# Altium PCB bumblebee.PcbDoc
Units mm, origin at the board's own origin, x right, y up, seen from the top; angles counter-clockwise.
Board outline 56 x 56 mm, 4 copper layers (L1 (Sig), L2 (GND), L3 (GND), L4 (Sig)), stack 1.589 mm thick; 50 components, 40 nets, 254 pads, 127 vias.
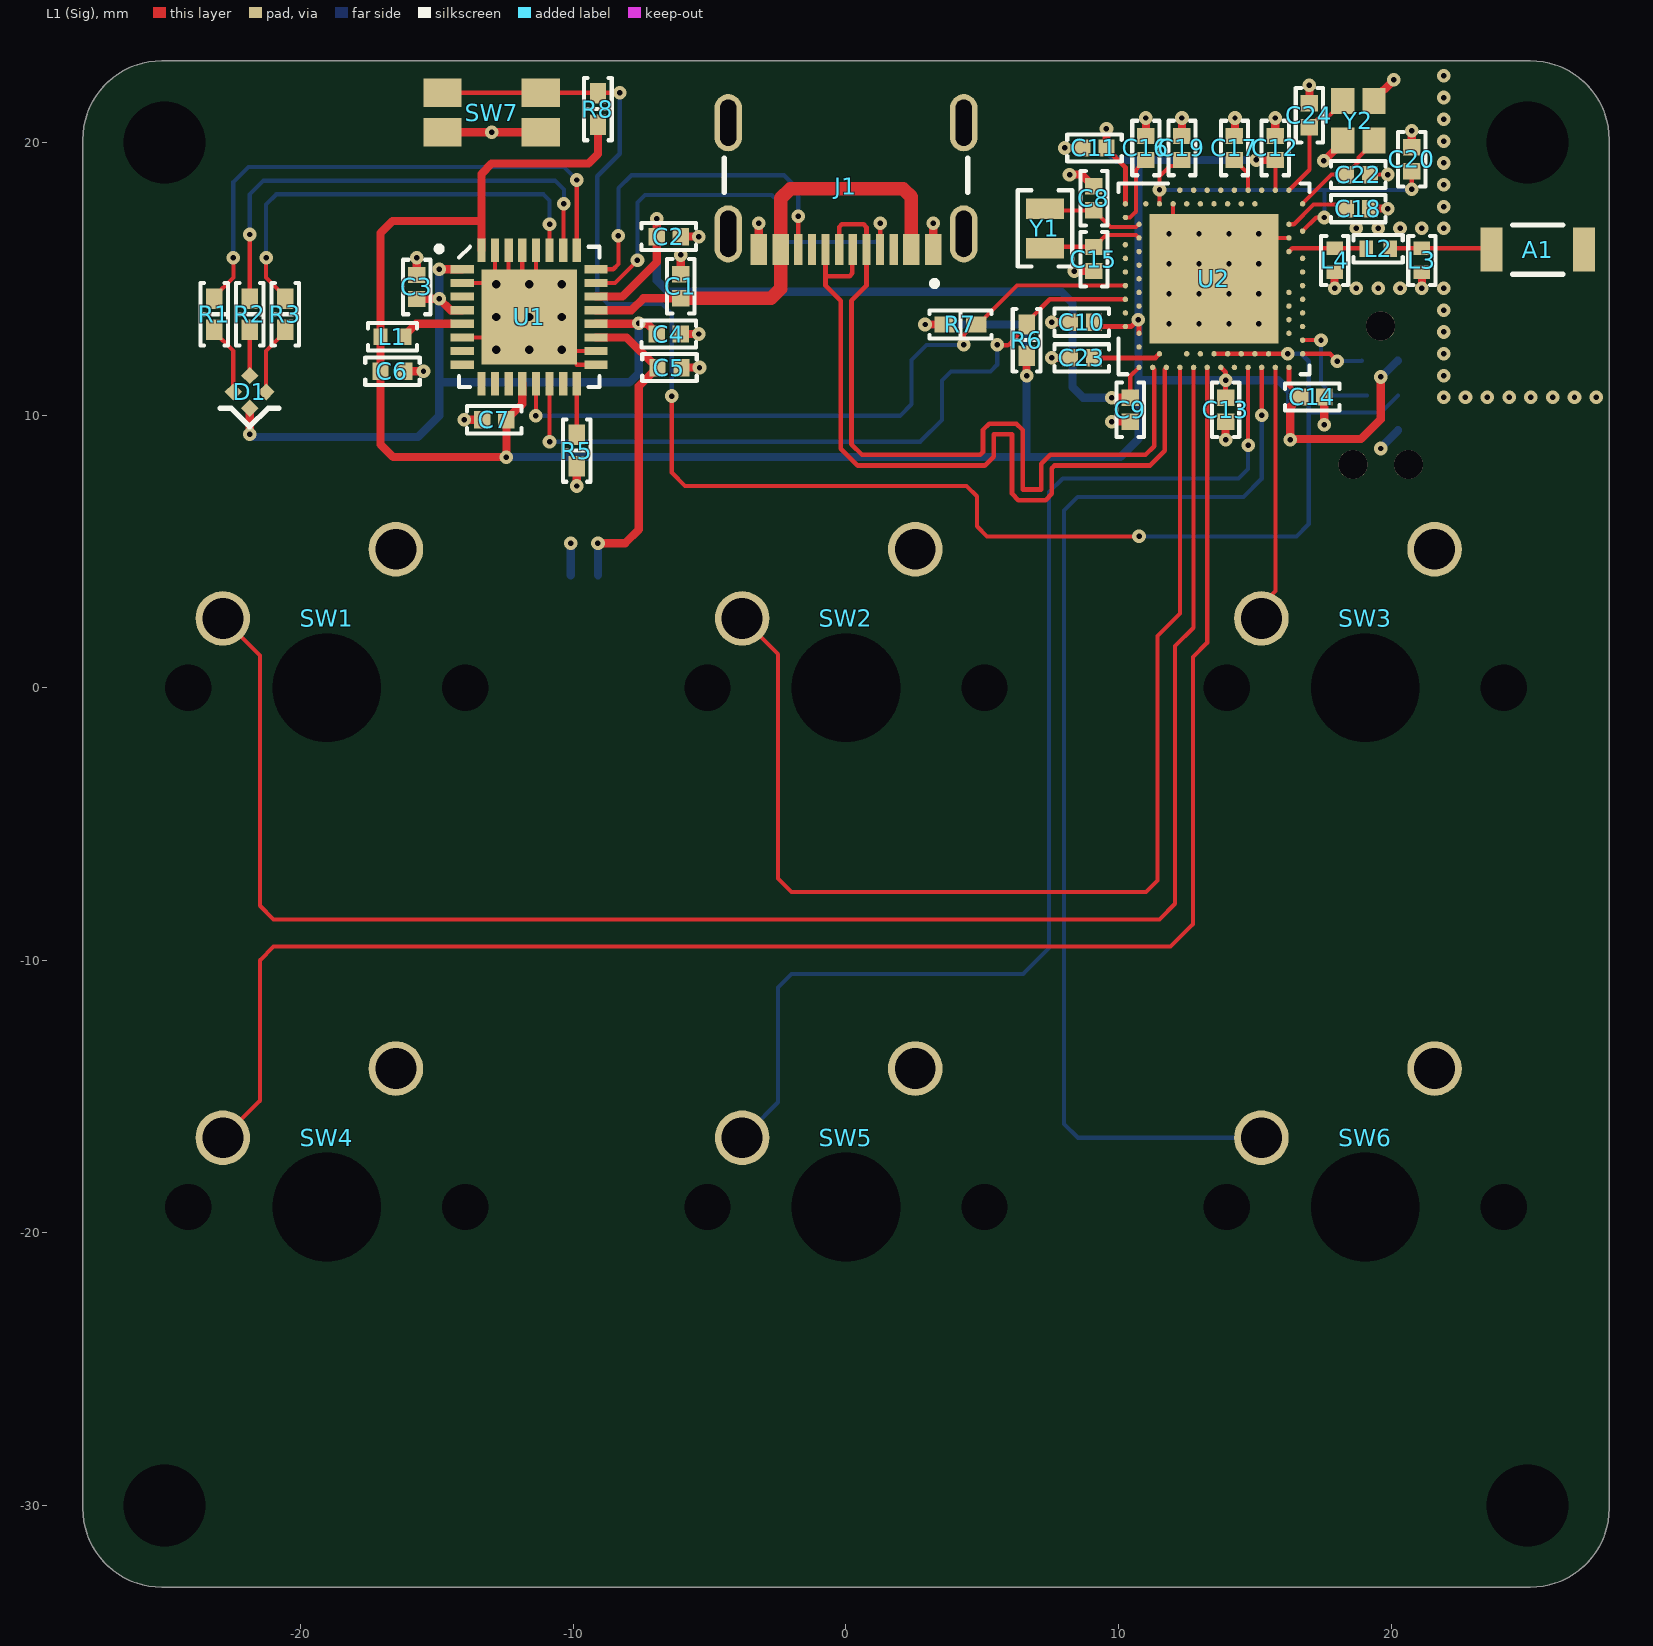
[diagram p0: L1 (Sig) view]
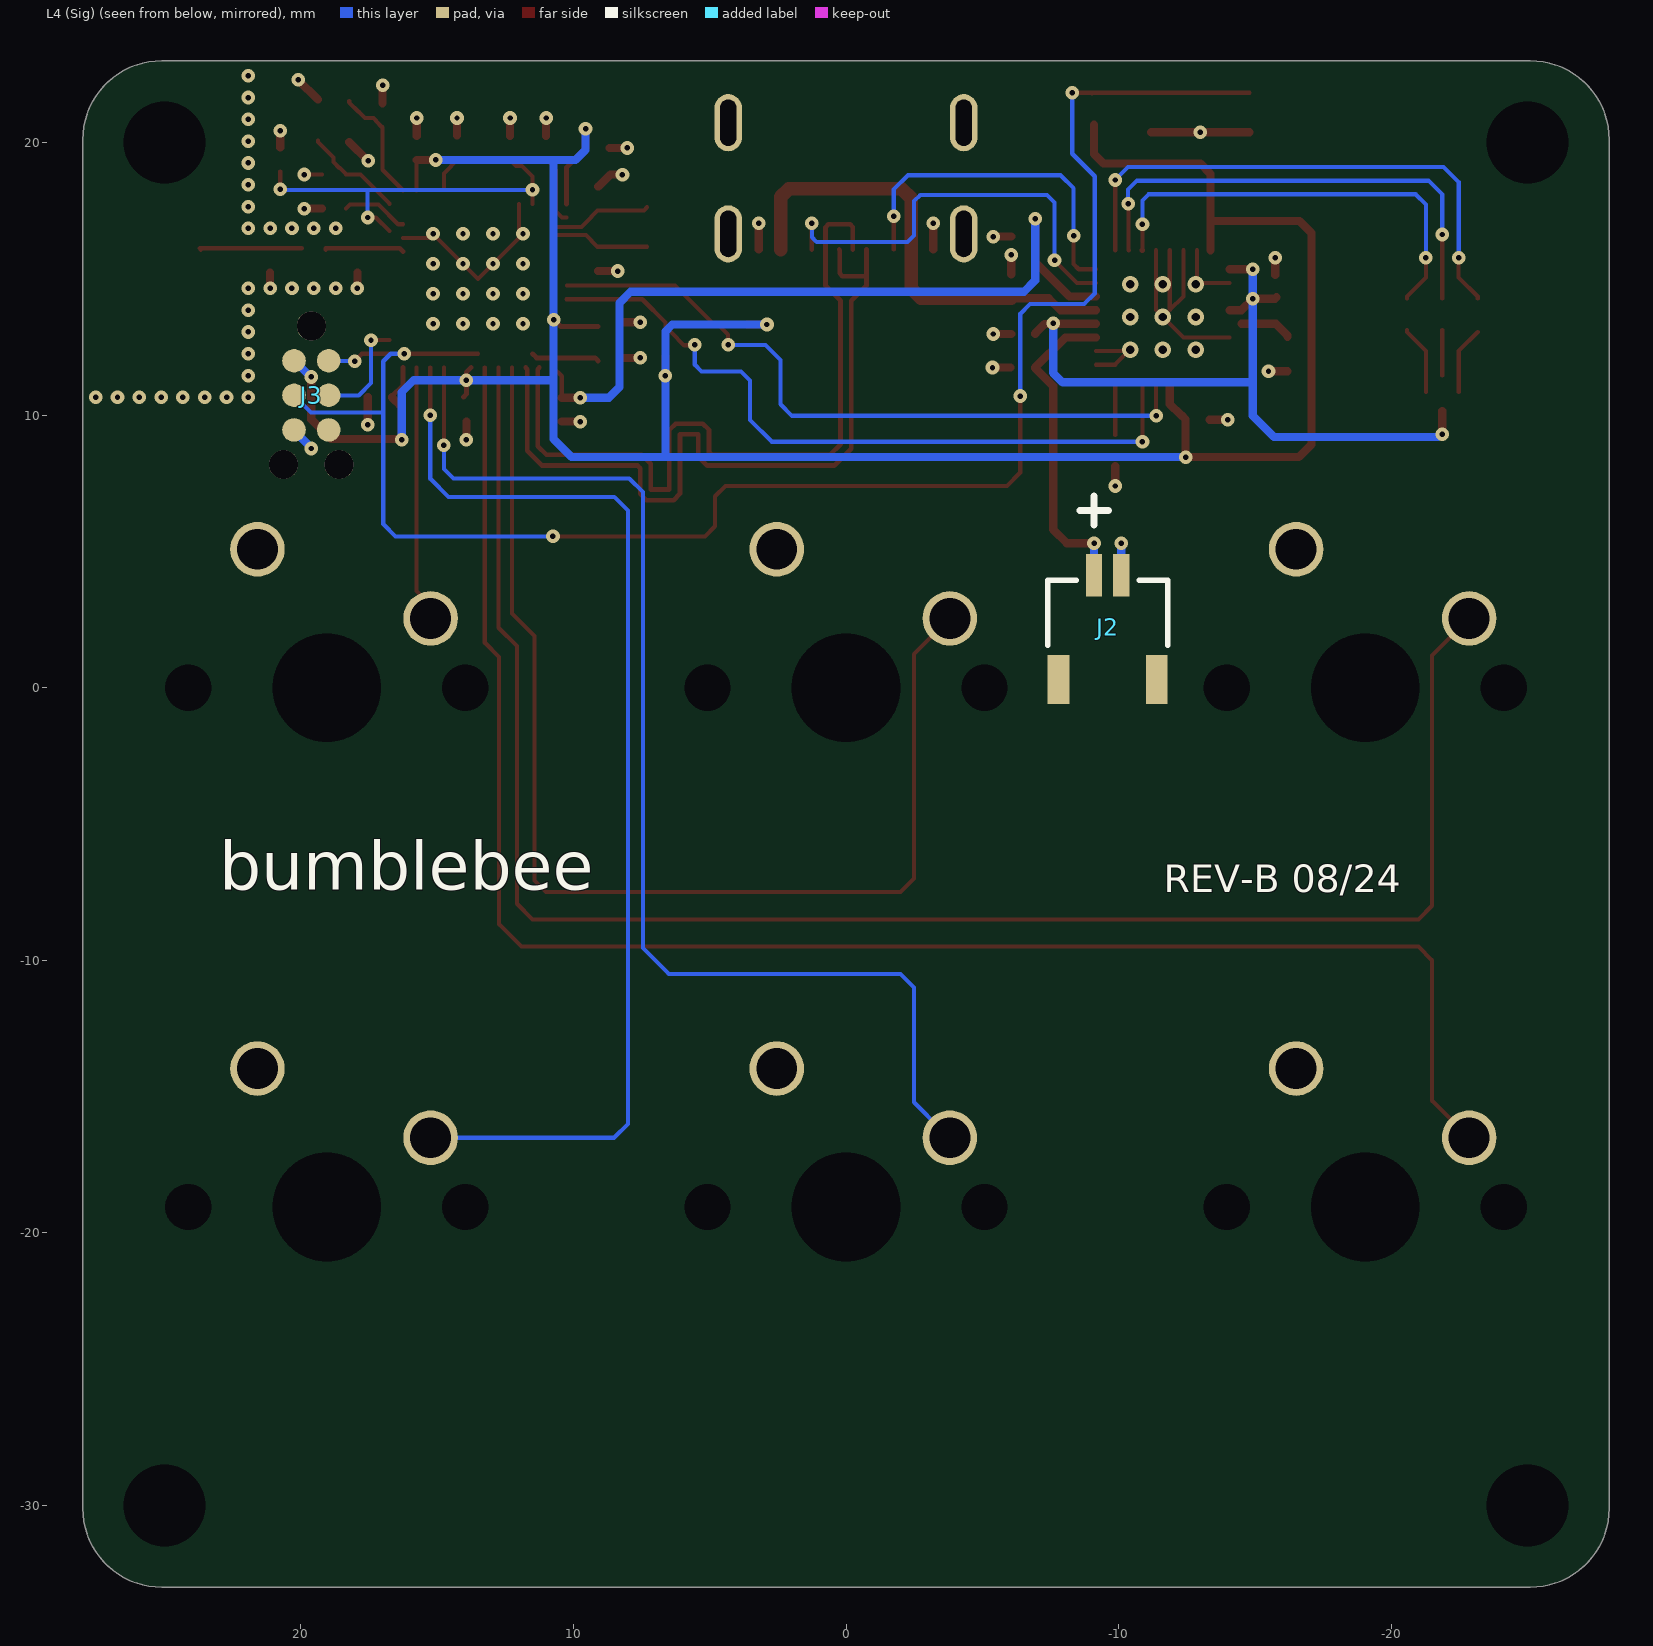
[diagram p1: L4 (Sig) view, seen from below]
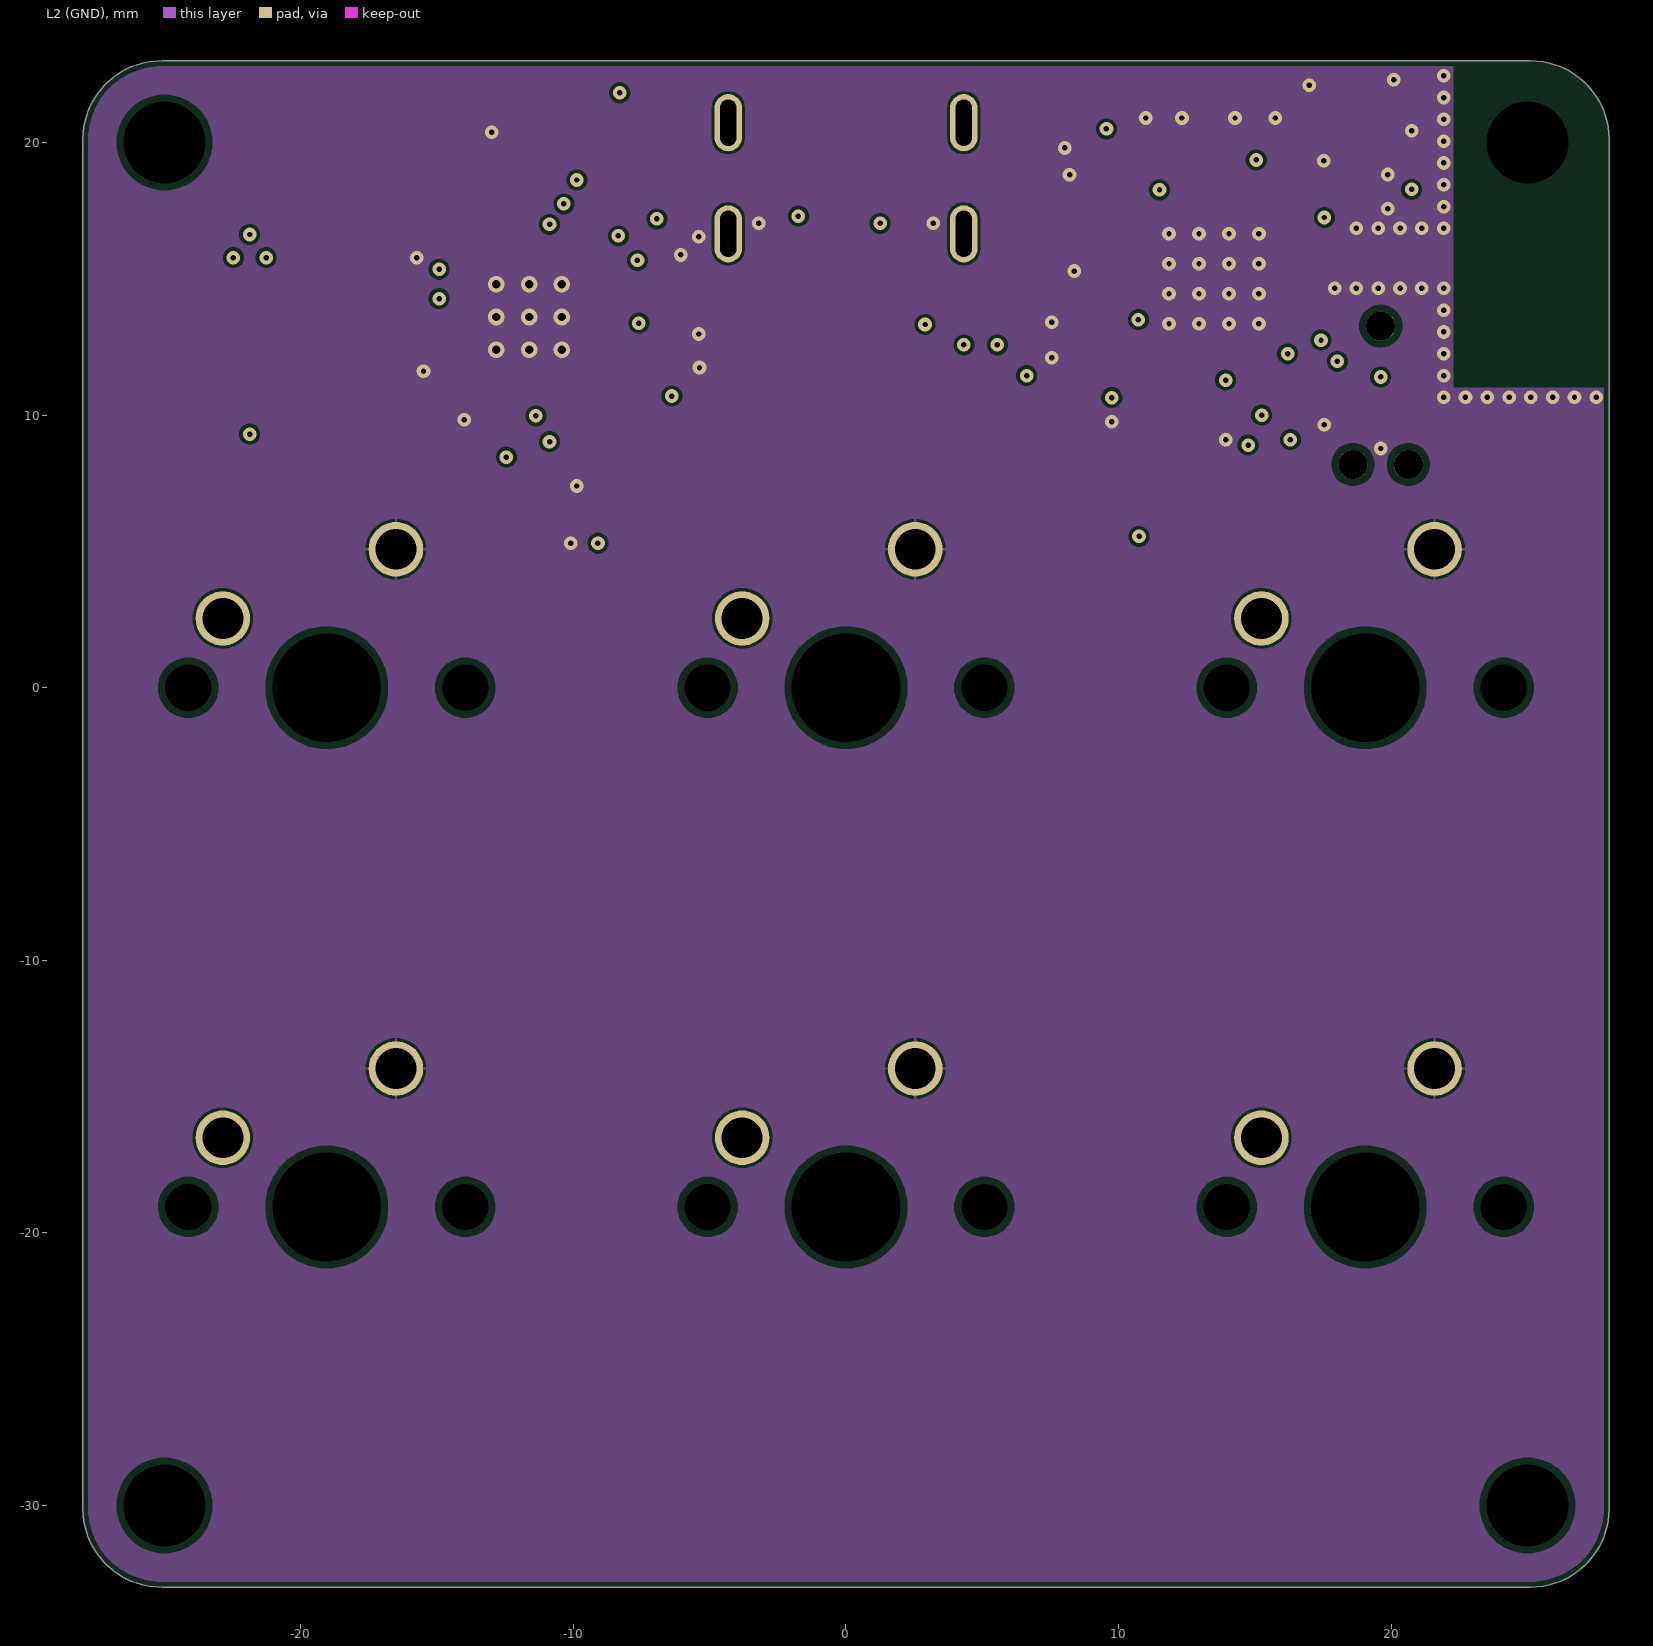
[diagram p2: L2 (GND)]
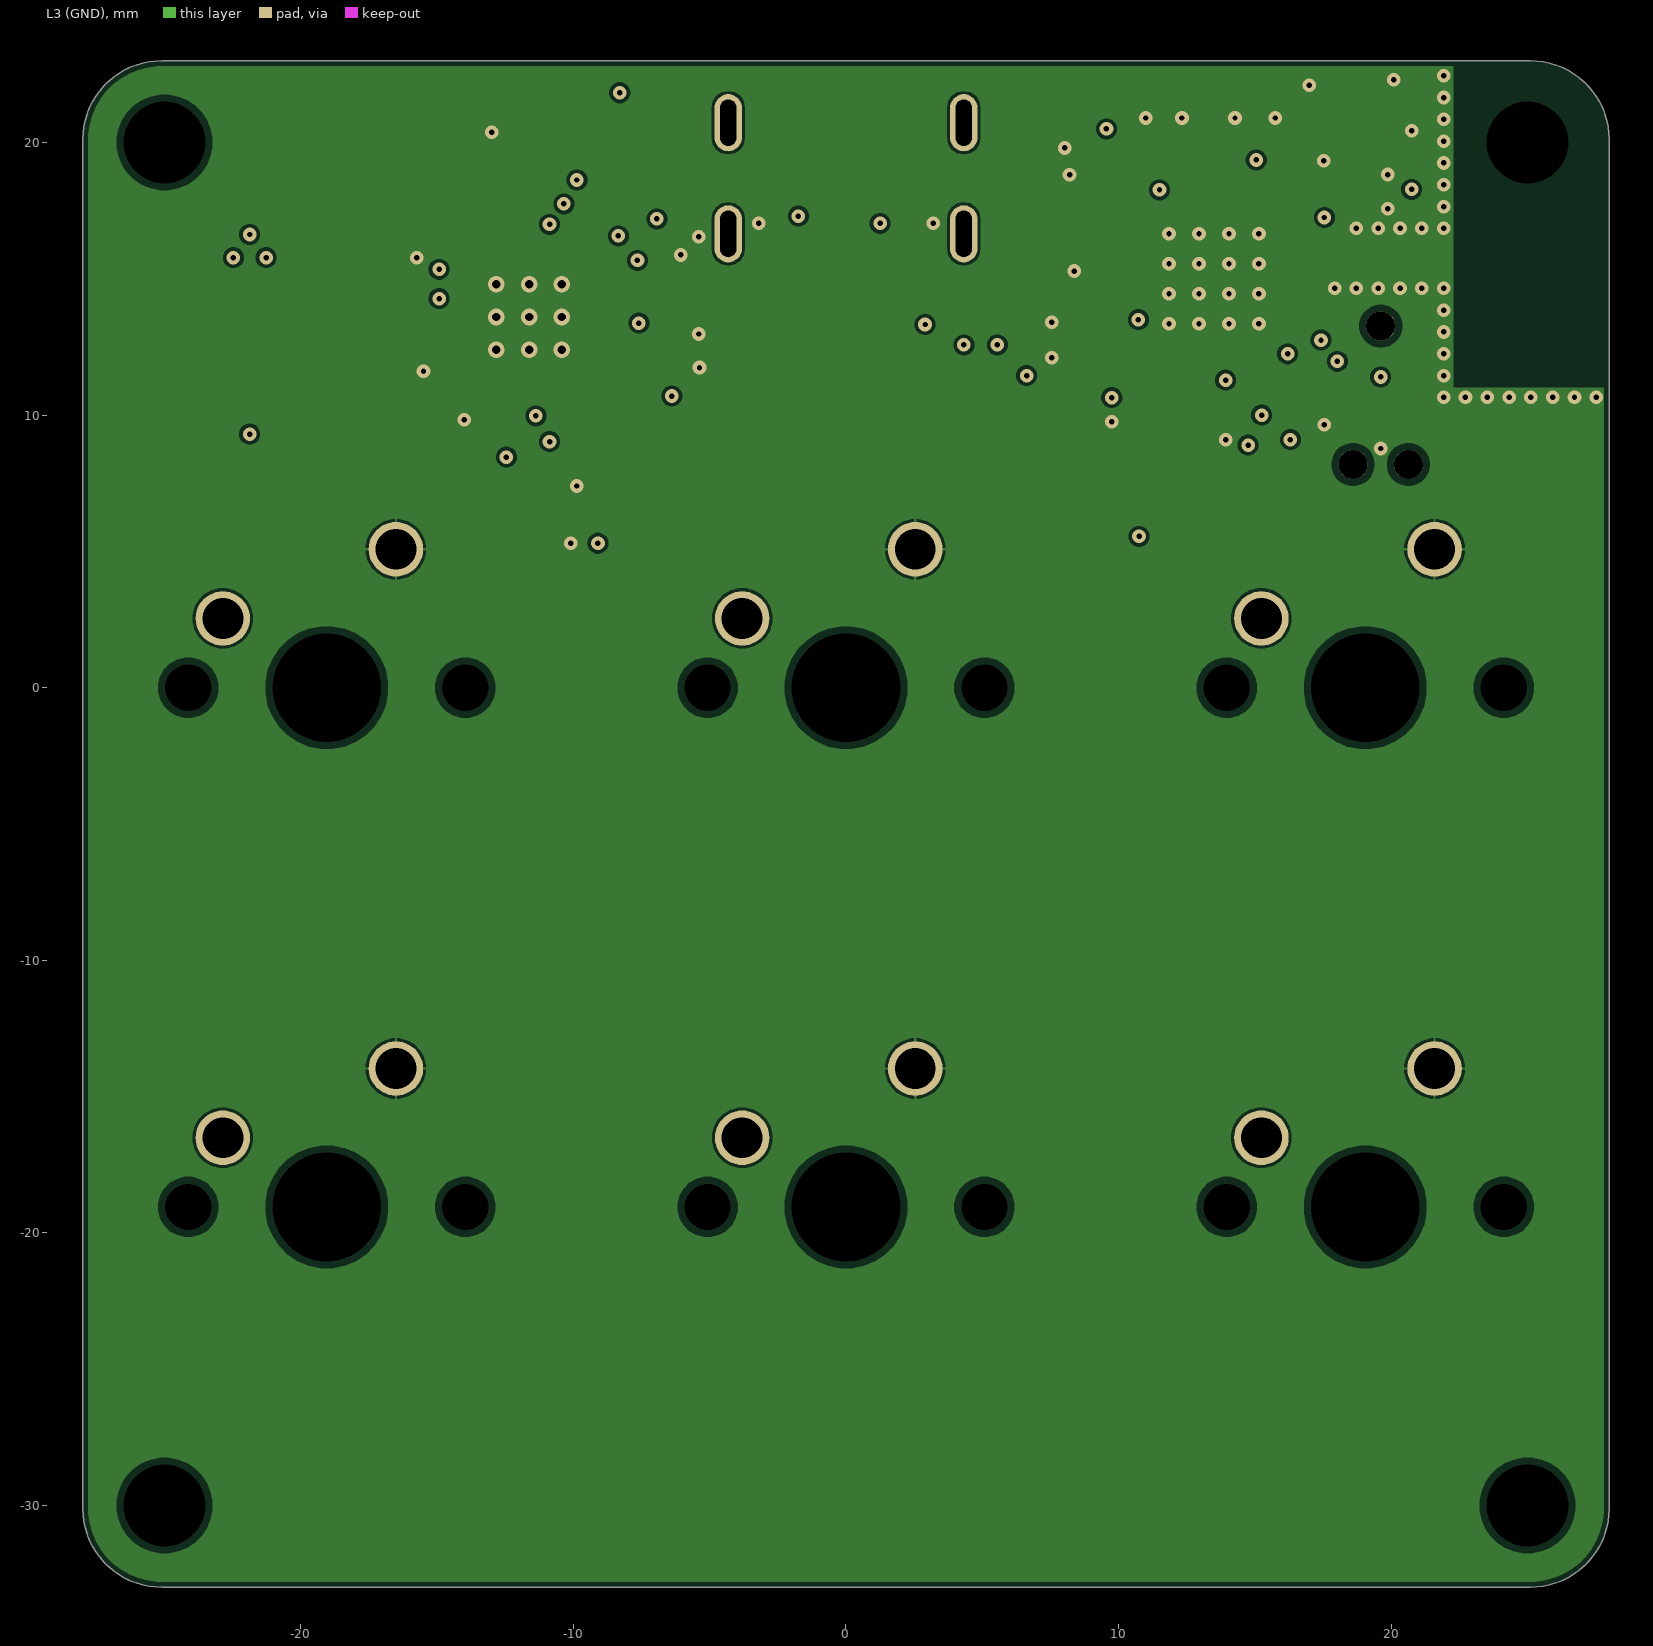
[diagram p3: L3 (GND)]

## Layer stack, top to bottom
Board Layer Stack Top Solder: solder mask 0.0254, SM-001, Dk 4
L1 (Sig): signal copper 0.035
Dielectric 1: prepreg 0.1118, PP-015, Dk 4.1
L2 (GND): signal copper 0.0152
Dielectric 3: core 1.265, Core-039, Dk 4.6
L3 (GND): signal copper 0.0152
Dielectric 5: prepreg 0.1118, PP-015, Dk 4.1
L4 (Sig): signal copper 0.035
Board Layer Stack Bottom Solder: solder mask 0.0254, SM-001, Dk 4

## Board outline
-28,-30.1 ccw(c-25.1,-30.1) -25.1,-33 25.1,-33 ccw(c25.1,-30.1) 28,-30.1 28,20.1 ccw(c25.1,20.1) 25.1,23 -25.1,23 ccw(c-25.1,20.1) -28,20.1

## Design rules (kind name [scope] priority, off if disabled: settings)
BoardOutlineClearance [All] p1: gap=0.2 ignorepadtopadclearanceinfootprint=FALSE
Clearance [All] p1: gap=0.102 ignorepadtopadclearanceinfootprint=FALSE except(0.127: Arc-Via Track-Via SMDPad-Via THPad-Via Via-Via Via-Fill Via-Poly Via-Region Via-Text; 0.25: Arc-Hole Track-Hole SMDPad-Hole THPad-Hole Via-Hole Fill-Hole Poly-Hole Region-Hole Text-Hole)
ComponentClearance [All] p1: gap=0.102 collisioncheckmode=3 verticalgap=0.102 showdistances=TRUE
DiffPairsRouting [All] p1: maxlimit=0.22 minlimit=0.2 mostfreqgap=0.2 toplayer_minwidth=0.17 toplayer_maxwidth=0.17 toplayer_prefwidth=0.17 bottomlayer_minwidth=0.17 bottomlayer_maxwidth=0.17 bottomlayer_prefwidth=0.17 impedanceprofiledriven=TRUE impedanceprofileid={1EA49EFE-481B-4B63-AF88-01475B9CDD26} impedanceprofilevalue=90.000000 maxuncoupledlength=12.7
Height [All] p1: minheight=0 maxheight=1816.048 prefheight=12.7
HoleSize [All] p1: absolutevalues=TRUE maxlimit=6.3 minlimit=0.2 maxpercent=80.000 minpercent=20.000
HoleToHoleClearance [All] p1: gap=0.5 allowstackedmicrovias=FALSE
MinimumAnnularRing [All] p1: minimumring=0.13
MinimumSolderMaskSliver [All] p1: minsoldermaskwidth=0
PlaneClearance [All] p1: clearance=0.102
PlaneConnect PlaneConnectPowerPads [InPadClass('PowerPads')] p1: planeconnectstyle=Direct reliefexpansion=0.508 reliefentries=4 reliefconductorwidth=0.254 reliefairgap=0.254
PlaneConnect [All] p2: pad.planeconnectstyle=Relief pad.reliefexpansion=0.3 pad.reliefentries=4 pad.reliefconductorwidth=0.102 pad.reliefairgap=0.102 via.planeconnectstyle=Direct via.reliefexpansion=0.3 via.reliefentries=4 via.reliefconductorwidth=0.127 via.reliefairgap=0.127
PolygonConnect PolygonConnectPowerPads [All vs (InPadClass('PowerPads'))] p1: connectstyle=Direct reliefconductorwidth=0.254 reliefentries=4 polygonreliefangle="90 Angle" airgapwidth=0.254
PolygonConnect [InNet('GND')] p2: thpad.connectstyle=Relief thpad.reliefconductorwidth=0.102 thpad.reliefentries=4 thpad.polygonreliefangle="90 Angle" thpad.airgapwidth=0.102 smdpad.connectstyle=Relief smdpad.reliefconductorwidth=0.102 smdpad.reliefentries=4 smdpad.polygonreliefangle="90 Angle" smdpad.airgapwidth=0.102 via.connectstyle=Direct via.reliefconductorwidth=0.127 via.reliefentries=4 via.polygonreliefangle="90 Angle" via.airgapwidth=0.127
RoutingVias [All] p1: holewidth=0.2 width=0.35 viastyle="Through Hole" minholewidth=0.2 minwidth=0.35 maxholewidth=6.3 maxwidth=6.55
SilkToSilkClearance [All] p1: silktosilkclearance=0
SilkToSolderMaskClearance [IsPad] p1: minsilkscreentomaskgap=0.102 clearancetoexposedcopper=TRUE
SolderMaskExpansion [All] p1: expansion=0.075 istentingtop=FALSE
SupplyNets "Schematic Supply Nets_8" [InNet('3V3')] p1: voltage=0.000
SupplyNets "Schematic Supply Nets_6" [InNet('VBUS')] p2: voltage=0.000
SupplyNets "Schematic Supply Nets_5" [InNet('VSYS')] p3: voltage=0.000
SupplyNets "Schematic Supply Nets_4" [InNet('VUSB')] p4: voltage=0.000
SupplyNets "Schematic Supply Nets_1" [InNet('VBAT')] p5: voltage=0.000
SupplyNets "Schematic Supply Nets" [InNet('GND')] p6: voltage=0.000
Width [All] p1: maxlimit=1816.048 minlimit=0.102 preferedwidth=0.102
20 further rules are at their usual default settings.

## Classes and differential pairs
component class 3_peripherals: J3 SW1 SW2 SW3 SW4 SW5 SW6
component class 1_power: C1 C2 C3 C4 C5 C6 C7 D1 J1 J2 L1 R1 R2 R3 R5 U1
component class 2_mcu: A1 C8 C9 C10 C11 C12 C13 C14 C15 C16 C17 C18 C19 C20 C22 C23 C24 L2 L3 L4 R6 R7 R8 SW7 U2 Y1 Y2
differential pair USB_D: +USB_D_P -USB_D_N

## Components (designator, comment, footprint, x,y, rotation, side; value= is the part's Value field where it differs from the comment)
A1 "AMCA31-2R450G-S1F-T3" FP-AMCA31-MFG 25.375,16.075 r0 top
C1 "1µ" "CAP 0402_1005" -6.06,14.725 r270 top
C2 "1 µ" "CAP 0402_1005" -6.5,16.55 r180 top
C3 "10 µ" "CAP 0402_1005" -15.75,14.7 r90 top
C4 "10 µ" "CAP 0402_1005" -6.5,12.975 r0 top
C5 "2.2 µ" "CAP 0402_1005" -6.475,11.745 r180 top
C6 "10 µ" "CAP 0402_1005" -16.637,11.608 r180 top
C7 "0.1µ" "CAP 0402_1005" -12.9,9.828 r0 top
C8 "18 p" "CAP 0402_1005" 9.095,17.95 r90 top
C9 "4.7 µ" "CAP 0402_1005" 10.425,10.2 r90 top
C10 "4.7 µ" "CAP 0402_1005" 8.655,13.408 r0 top
C11 "1µ" "CAP 0402_1005" 9.115,19.8 r0 top
C12 "0.1µ" "CAP 0402_1005" 15.75,19.8 r270 top
C13 "0.1µ" "CAP 0402_1005" 13.925,10.2 r90 top
C14 "0.1µ" "CAP 0402_1005" 17.1,10.665 r180 top
C15 "18 p" "CAP 0402_1005" 9.095,15.725 r270 top
C16 "0.1µ" "CAP 0402_1005" 11,19.8 r270 top
C17 "N.C." "CAP 0402_1005" 14.25,19.8 r270 top
C18 "100 p" "CAP 0402_1005" 18.785,17.575 r180 top
C19 "N.C." "CAP 0402_1005" 12.325,19.8 r270 top
C20 "1µ" "CAP 0402_1005" 20.752,19.38 r270 top
C22 "8 p" "CAP 0402_1005" 18.785,18.825 r180 top
C23 "4.7 µ" "CAP 0402_1005" 8.655,12.1 r180 top
C24 "8 p" "CAP 0402_1005" 17,21 r270 top
D1 "Red, Green, Blue (RGB)" "Citizen CL-505S-X-SD-T" -21.876,10.851 r315 top
J1 "USB4105-GF-A" GCT_USB4105-GF-A 0,18.4 r180 top
J2 "T1M-02-T-SH-L-K" SAMTEC_T1M-02-T-SH-L-K -9.6,4.125 r180 bottom locked
J3 "TC2030-IDC-NL" TAG_TC2030-IDC-NL 19.615,10.725 r270 bottom
L1 "2.2 µ" "IND 0402_1005" -16.637,12.878 r180 top
L2 "8.3 n" "IND 0402_1005" 19.525,16.1 r180 top
L3 "N.C." "IND 0402_1005" 21.125,15.675 r90 top value="8.3 n"
L4 "9.7 n" "IND 0402_1005" 17.925,15.675 r270 top
R1 "470R" "RES 0402_1005" -23.175,13.7 r90 top
R2 "470 Ohms" "RES 0402_1005" -21.876,13.7 r90 top
R3 "470 Ohms" "RES 0402_1005" -20.575,13.7 r90 top
R5 "300 k" "RES 0402_1005" -9.875,8.7 r90 top
R6 "10 k" "RES 0402_1005" 6.625,12.75 r90 top
R7 "10 k" "RES 0402_1005" 4.2,13.325 r180 top
R8 "10 k" "RES 0402_1005" -9.1,21.225 r90 top
SW1 "MX1A-11NW" CHRY-MX1A-11NW_V -19.05,0 r0 top locked
SW2 "MX1A-11NW" CHRY-MX1A-11NW_V 0,0 r0 top locked
SW3 "MX1A-11NW" CHRY-MX1A-11NW_V 19.05,0 r0 top locked
SW4 "MX1A-11NW" CHRY-MX1A-11NW_V -19.05,-19.05 r0 top locked
SW5 "MX1A-11NW" CHRY-MX1A-11NW_V 0,-19.05 r0 top locked
SW6 "MX1A-11NW" CHRY-MX1A-11NW_V 19.05,-19.05 r0 top locked
SW7 "PTS840 GK SMTR LFS" EVQP7A_J_B_K -13,21.1 r180 top
U1 "NPM1300-QEAA-R" Nordic_QFN50P500X500X90-33N -11.625,13.6 r0 top locked
U2 "NRF52840-QIAA-R" NRSC-AQFN-73 13.5,15 r0 top locked
Y1 "32.768 kHz" "ABRACON ABS06" 7.3,16.85 r90 top locked
Y2 "32MHz" BT-XTAL_2016 18.8,20.8 r90 top locked

## Footprints (in the part's own frame and the unit in brackets; to place one, negate y for a bottom-side part, rotate by r counter-clockwise, add the part's x,y. Pads: shape width x height; smd on the part's side, far side on the other; paste and mask are expansions set on the pad)
"ABRACON ABS06" [mm] "Crystal, 2-Leads, Body 1.20x2.00mm, Pitch 1.50mm, IPC Medium Density"
  rect 0.75x1.4 smd: 1(-0.725,0) 2(0.725,0)
  silkscreen extent -1.4,-1 1.4,1, body extent -1.02,-0.62 1.03,0.63, height 0.6
BT-XTAL_2016 [mm]
  rect 0.95x0.85 smd: 1(-0.725,-0.575) 2(0.725,-0.575) 3(0.725,0.575) 4(-0.725,0.575)
  body extent -1.05,-0.85 1.05,0.85, height 0.56
"CAP 0402_1005" [mm] "Chip Capacitor, 2-Leads, Body 1.02x0.51mm, IPC Medium Density"
  rect 0.6x0.64 smd: 1(-0.44,0) 2(0.44,0)
  silkscreen extent -1,-0.5 1,0.5, body extent -0.5,-0.26 0.5,0.26, height 0.52
CHRY-MX1A-11NW_V [mm] "THD, 2-Leads, Body 15.6x15.6mm"
  round 2 hole 1.499 paste-2539.97: 1(-3.81,2.54) 2(2.54,5.08)
  round 0 hole 3.988 unplated paste-2539.97: MH1(0,0)
  round 0 hole 1.702 unplated paste-2539.97: MH2(-5.08,0) MH3(5.08,0)
"Citizen CL-505S-X-SD-T" [mm] "4-Leads, Body 1.0x1.0mm"
  rect 0.45x0.45 smd mask+0: 1(-0.425,-0.425) 3(0.425,0.425)
  rect 0.45x0.45 smd paste+0 mask+0: 2(-0.425,0.425) 4(0.425,-0.425)
  silkscreen extent -0.33,-1.18 1.18,0.33, body extent -0.5,-0.5 0.5,0.5, height 0.26
EVQP7A_J_B_K [mm]
  rect 1.4x1.05 smd: 1(-1.8,0.725) 1(1.8,0.725) 2(-1.8,-0.725) 2(1.8,-0.725)
  body extent -2.35,-2.1 2.35,1.45, height 1.35
FP-AMCA31-MFG [mm]
  rect 0.8x1.6 smd paste+0 mask+0: 1(-1.7,0) 2(1.7,0)
  silkscreen extent -0.92,-0.9 0.92,0.9, body extent -2.2,-1 2.2,1, height 0.25
GCT_USB4105-GF-A [mm]
  rect 0.6x1.15 smd: A1B12(-3.2,2.327) A4B9(-2.4,2.327) B1A12(3.2,2.327) B4A9(2.4,2.327)
  rect 0.3x1.15 smd: A5(-1.25,2.327) A6(-0.25,2.327) A7(0.25,2.327) A8(1.25,2.327) B5(1.75,2.327) B6(0.75,2.327) B7(-0.75,2.327) B8(-1.75,2.327)
  oval 1x2.1 hole 0.6 slot 1.7 at 90 deg: SH1(-4.32,1.752) SH2(4.32,1.752) SH3(-4.32,-2.327) SH4(4.32,-2.327)
  silkscreen extent -4.47,-1.03 4.47,3.67, body extent -4.47,-5.03 4.47,2.68, height 3.31
"IND 0402_1005" [mm] "Inductor, 2-Leads, Body 1.02x0.51mm, IPC Medium Density"
  rect 0.5x0.6 smd: 1(-0.44,0) 2(0.44,0)
  silkscreen extent -0.9,-0.5 0.9,0.5, body extent -0.5,-0.3 0.5,0.3, height 0.6
Nordic_QFN50P500X500X90-33N [mm]
  rect 0.85x0.3 smd mask+0.076: 1(-2.45,1.75) 2(-2.45,1.25) 3(-2.45,0.75) 4(-2.45,0.25) 5(-2.45,-0.25) 6(-2.45,-0.75) 7(-2.45,-1.25) 8(-2.45,-1.75) 17(2.45,-1.75) 18(2.45,-1.25) 19(2.45,-0.75) 20(2.45,-0.25) 21(2.45,0.25) 22(2.45,0.75) 23(2.45,1.25) 24(2.45,1.75)
  rect 0.3x0.85 smd mask+0.076: 9(-1.75,-2.45) 10(-1.25,-2.45) 11(-0.75,-2.45) 12(-0.25,-2.45) 13(0.25,-2.45) 14(0.75,-2.45) 15(1.25,-2.45) 16(1.75,-2.45) 25(1.75,2.45) 26(1.25,2.45) 27(0.75,2.45) 28(0.25,2.45) 29(-0.25,2.45) 30(-0.75,2.45) 31(-1.25,2.45) 32(-1.75,2.45)
  rect 3.5x3.5 smd: 33(0,0)
  silkscreen extent -3.4,-2.57 2.57,2.6, body extent -2.5,-2.5 2.5,2.5, height 0.9
NRSC-AQFN-73 [mm] "AQFN, 73-Leads, Body 7x7mm, Pitch 0.5mm"
  rect 4.75x4.75 smd: 74(0,0)
  round 0.2 smd: A8(-1.25,3.25) A10(-0.75,3.25) A12(-0.25,3.25) A14(0.25,3.25) A16(0.75,3.25) A18(1.25,3.25) A20(1.75,3.25) A22(2.25,3.25) A23(2.75,3.25) AA24(3.25,-2.25) AB2(-2.75,-2.5) AC5(-2,-2.75) AC9(-1,-2.75) AC11(-0.5,-2.75) AC13(0,-2.75) AC15(0.5,-2.75) AC17(1,-2.75) AC19(1.5,-2.75) AC21(2,-2.75) AC24(3.25,-2.75) AD2(-2.75,-3.25) AD4(-2.25,-3.25) AD6(-1.75,-3.25) AD8(-1.25,-3.25) AD10(-0.75,-3.25) AD12(-0.25,-3.25) AD14(0.25,-3.25) AD16(0.75,-3.25) AD18(1.25,-3.25) AD20(1.75,-3.25) AD22(2.25,-3.25) AD23(2.75,-3.25) B1(-3.25,2.75) B3(-2.5,2.75) B5(-2,2.75) B7(-1.5,2.75) B9(-1,2.75) B11(-0.5,2.75) B13(0,2.75) B15(0.5,2.75) B17(1,2.75) B19(1.5,2.75) B24(3.25,2.75) C1(-3.25,2.25) D2(-2.75,2) D23(2.75,2) E24(3.25,1.75) F2(-2.75,1.5) F23(2.75,1.5) G1(-3.25,1.25) H2(-2.75,1) H23(2.75,1) J1(-3.25,0.75) J24(3.25,0.75) K2(-2.75,0.5) L1(-3.25,0.25) L24(3.25,0.25) M2(-2.75,0) N1(-3.25,-0.25) N24(3.25,-0.25) P2(-2.75,-0.5) P23(2.75,-0.5) R1(-3.25,-0.75) R24(3.25,-0.75) T2(-2.75,-1) T23(2.75,-1) U1(-3.25,-1.25) U24(3.25,-1.25) V23(2.75,-1.5) W1(-3.25,-1.75) W24(3.25,-1.75) Y2(-2.75,-2) Y23(2.75,-2)
  silkscreen extent -3.5,-3.5 3.5,3.5, body extent -3.5,-3.5 3.5,3.5, height 0.85
"RES 0402_1005" [mm] "Chip Resistor, 2-Leads, Body 1.0x0.5mm, IPC Medium Density"
  rect 0.75x0.6 smd: 1(-0.575,0) 2(0.575,0)
  silkscreen extent -1.14,-0.51 1.14,0.51, body extent -0.5,-0.25 0.5,0.25, height 0.35
SAMTEC_T1M-02-T-SH-L-K [mm]
  rect 0.6x1.55 smd: 1(-0.5,0) 2(0.5,0)
  rect 0.8x1.8 smd: S1(-1.8,-3.825) S2(1.8,-3.825)
  silkscreen extent -2.2,-2.58 2.2,-0.18, body extent -2.03,-4.89 1.97,0.06, height 2.95
TAG_TC2030-IDC-NL [mil]
  round 33.98 smd: 1(-50,-25) 2(-50,25) 3(0,-25) 4(0,25) 5(50,-25) 6(50,25)
  round 42.01 hole 42.01 unplated: MH1(-100,0) MH2(100,40) MH3(100,-40)

## Part data
A1: library part CMP-00025-00004-1, "2.45GHz Bluetooth, IoT, ISM, M2M, Wi-Fi, ZigBee™ Chip RF Antenna 2.4GHz ~ 2.5GHz 2.3dBi Solder Surface Mount", Case/Package=Chip, Frequency=2.45GHz, Max Operating Temperature=85°C, Min Operating Temperature=-40°C, Power - Max="3 W", Gain=2.3dBi, Impedance=50Ω, Mounting Technology="Surface Mount", Pins=2, RF Family/Standard="Bluetooth, General ISM, WiFi", RoHS Compliant="ROHS3 Compliant"
C1 C11 C20: library part 885012105012, "CAP CER 1UF 10V X5R 0402", Capacitance="1 µF", Device Package="0402 (1005 Metric)", Manufacturer="Würth Elektronik", Operating Temperature="-55°C ~ 85°C", Supplier Part Number 1=732-7489-1-ND, Temperature Coefficient=X5R, Tolerance=±20%, Voltage - Rated=10V, Applications="General Purpose", ComponentLink1Description=Datasheet, ComponentLink1URL=https://katalog.we-online.de/pbs/datasheet/885012105012.pdf, ComponentLink2Description="DigiKey Link", ComponentLink2URL=https://www.digikey.com/en/products/detail/würth-elektronik/885012105012/5453344, lastupdated="2/9/2024 8:04:38 PM", Lifecycle Status=Active, Minimum Order=1, Mounting Type="Surface Mount, MLCC", Package / Case="0402 (1005 Metric)", Packaging=TapeAndReel, Part Number=885012105012, Part Status=Active, partid=1807, Price=0.16, Series=WCAP-CSGP, Size / Dimension="0.039\" L x 0.020\" W (1.00mm x 0.50mm)", Supplier 1=DigiKey, Thickness (Max)="0.022\" (0.55mm)"
C2: library part 885012105012, "CAP CER 1UF 10V X5R 0402", Device Package="0402 (1005 Metric)", Manufacturer="Würth Elektronik", Operating Temperature="-55°C ~ 85°C", Supplier Part Number 1=732-7489-1-ND, Temperature Coefficient=X5R, Tolerance=±20%, Voltage - Rated=10V, Applications="General Purpose", Capacitance="1 µ", ComponentLink1Description=Datasheet, ComponentLink1URL=https://katalog.we-online.de/pbs/datasheet/885012105012.pdf, ComponentLink2Description="DigiKey Link", ComponentLink2URL=https://www.digikey.com/en/products/detail/würth-elektronik/885012105012/5453344, lastupdated="2/9/2024 8:04:38 PM", Lifecycle Status=Active, Minimum Order=1, Mounting Type="Surface Mount, MLCC", Package / Case="0402 (1005 Metric)", Packaging=TapeAndReel, Part Number=885012105012, Part Status=Active, partid=1807, Price=0.16, Series=WCAP-CSGP, Size / Dimension="0.039\" L x 0.020\" W (1.00mm x 0.50mm)", Supplier 1=DigiKey, Thickness (Max)="0.022\" (0.55mm)"
C3 C4 C6: library part CL05A106MP8NUB8, "CAP CER 10UF 10V X5R 0402", Capacitance="10 µF", Device Package="0402 (1005 Metric)", Manufacturer="Samsung Electro-Mechanics", Operating Temperature="-55°C ~ 85°C", Supplier Part Number 1=1276-6830-1-ND, Temperature Coefficient=X5R, Tolerance=±20%, Voltage - Rated=10V, Applications="Acoustic Noise Reduction", ComponentLink1Description=Datasheet, ComponentLink1URL=http://www.samsungsem.com/kr/support/product-search/mlcc/CL05A106MP8NUB8.jsp, ComponentLink2Description="DigiKey Link", ComponentLink2URL=https://www.digikey.com/en/products/detail/samsung-electro-mechanics/CL05A106MP8NUB8/5961314, lastupdated="2/9/2024 8:04:38 PM", Lifecycle Status=Active, Minimum Order=1, Mounting Type="Surface Mount, MLCC", Package / Case="0402 (1005 Metric)", Packaging=TapeAndReel, Part Number=CL05A106MP8NUB8, Part Status=Active, partid=1758, Price=0.06, Series=CL, Size / Dimension="0.039\" L x 0.020\" W (1.00mm x 0.50mm)", Supplier 1=DigiKey, Thickness (Max)="0.035\" (0.90mm)"
C5: library part TMK105CBJ225KV-F, "CAP CER 2.2UF 25V X5R 0402", Capacitance="2.2 µF", Device Package="0402 (1005 Metric)", Manufacturer="Taiyo Yuden", Operating Temperature="-55°C ~ 85°C", Supplier Part Number 1=587-6277-1-ND, Temperature Coefficient=X5R, Tolerance=±10%, Voltage - Rated=25V, Applications="SMPS Filtering", ComponentLink1Description=Datasheet, ComponentLink1URL="https://ds.yuden.co.jp/TYCOMPAS/ut/detail?pn=TMK105CBJ225KV-F &u=M", ComponentLink2Description="DigiKey Link", ComponentLink2URL=https://www.digikey.com/en/products/detail/taiyo-yuden/TMK105CBJ225KV-F/7403799, lastupdated="2/9/2024 8:04:38 PM", Lifecycle Status=Active, Minimum Order=1, Mounting Type="Surface Mount, MLCC", Package / Case="0402 (1005 Metric)", Packaging=TapeAndReel, Part Number=TMK105CBJ225KV-F, Part Status=Active, partid=1822, Price=0.02, Series=M, Size / Dimension="0.039\" L x 0.020\" W (1.00mm x 0.50mm)", Supplier 1=DigiKey, Thickness (Max)="0.028\" (0.70mm)"
C7 C12 C13 C14 C16 C17 C19: library part 0402ZC104KAT2A, "CAP CER 0.1UF 10V X7R 0402", Capacitance=0.1µF, Device Package="0402 (1005 Metric)", Manufacturer="AVX Corporation", Operating Temperature="-55°C ~ 125°C", Supplier Part Number 1=478-7891-1-ND, Temperature Coefficient=X7R, Tolerance=±10%, Voltage - Rated=10V, Applications="General Purpose", ComponentLink1Description=Datasheet, ComponentLink1URL=http://datasheets.avx.com/X7RDielectric.pdf, ComponentLink2Description="DigiKey Link", ComponentLink2URL=http://digikey.com/product-detail/en/avx-corporation/0402ZC104KAT2A/478-7891-1-ND/3881514, lastupdated="2/8/2022 12:26:59 PM", Lifecycle Status=Active, Minimum Order=1, Mounting Type="Surface Mount, MLCC", Package / Case="0402 (1005 Metric)", Packaging=TapeAndReel, Part Number=0402ZC104KAT2A, Part Status=Active, partid=1757, Price=0.09, Series=-, Size / Dimension="0.039\" L x 0.020\" W (1.00mm x 0.50mm)", Supplier 1=DigiKey, Thickness (Max)="0.022\" (0.55mm)"
C8 C15: library part HMK105CG180JV-F, "CAP CER 18PF 100V C0G/NP0 0402", Capacitance="18 pF", Device Package="0402 (1005 Metric)", Manufacturer="Taiyo Yuden", Operating Temperature="-55°C ~ 125°C", Supplier Part Number 1=587-5003-1-ND, Temperature Coefficient="C0G, NP0", Tolerance=±5%, Voltage - Rated=100V, Applications="General Purpose", ComponentLink1Description=Datasheet, ComponentLink1URL=http://www.yuden.co.jp/productdata/catalog/mlcc06_e.pdf, ComponentLink2Description="DigiKey Link", ComponentLink2URL=https://www.digikey.com/en/products/detail/taiyo-yuden/HMK105CG180JV-F/6563596, lastupdated="2/9/2024 8:04:38 PM", Lifecycle Status=Active, Minimum Order=1, Mounting Type="Surface Mount, MLCC", Package / Case="0402 (1005 Metric)", Packaging=TapeAndReel, Part Number=HMK105CG180JV-F, Part Status=Active, partid=1849, Price=0.03, Series=M, Size / Dimension="0.039\" L x 0.020\" W (1.00mm x 0.50mm)", Supplier 1=DigiKey, Thickness (Max)="0.022\" (0.55mm)"
C9 C10 C23: library part CL05A475MO5NUNC, "CAP CER 4.7UF 16V X5R 0402", Capacitance="4.7 µF", Device Package="0402 (1005 Metric)", Manufacturer="Samsung Electro-Mechanics", Operating Temperature="-55°C ~ 85°C", Supplier Part Number 1=1276-6836-1-ND, Temperature Coefficient=X5R, Tolerance=±20%, Voltage - Rated=16V, Applications="General Purpose", ComponentLink1Description=Datasheet, ComponentLink1URL=http://www.samsungsem.com/kr/support/product-search/mlcc/__icsFiles/afieldfile/2019/05/29/Data%20sheet_CL05A475MO5NUNC.pdf, ComponentLink2Description="DigiKey Link", ComponentLink2URL=https://www.digikey.com/en/products/detail/samsung-electro-mechanics/CL05A475MO5NUNC/5961320, lastupdated="2/9/2024 8:04:38 PM", Lifecycle Status=Active, Minimum Order=1, Mounting Type="Surface Mount, MLCC", Package / Case="0402 (1005 Metric)", Packaging=TapeAndReel, Part Number=CL05A475MO5NUNC, Part Status=Active, partid=1760, Price=0.08, Series=CL, Size / Dimension="0.039\" L x 0.020\" W (1.00mm x 0.50mm)", Supplier 1=DigiKey, Thickness (Max)="0.028\" (0.70mm)"
C18: library part 500X07N101MV4T, "CAP CER 100PF 50V C0G/NP0 0402", Capacitance="100 pF", Device Package="0402 (1005 Metric)", Manufacturer="Johanson Dielectrics Inc.", Operating Temperature="-55°C ~ 125°C", Supplier Part Number 1=709-1214-1-ND, Temperature Coefficient="C0G, NP0", Tolerance=±20%, Voltage - Rated=50V, Applications="Bypass, Decoupling", ComponentLink1Description=Datasheet, ComponentLink1URL=https://www.johansondielectrics.com/downloads/x2y-filter-and-decoupling-capacitors.pdf, ComponentLink2Description="DigiKey Link", ComponentLink2URL=https://www.digikey.com/en/products/detail/johanson-dielectrics-inc/500X07N101MV4T/2046917, Features="Low ESL (X2Y)", lastupdated="2/9/2024 8:04:38 PM", Lifecycle Status=Active, Minimum Order=1, Mounting Type="Surface Mount, MLCC", Package / Case="0402 (1005 Metric)", Packaging=TapeAndReel, Part Number=500X07N101MV4T, Part Status=Active, partid=1767, Price=0.08, Series=X2Y®, Size / Dimension="0.045\" L x 0.025\" W (1.14mm x 0.64mm)", Supplier 1=DigiKey, Thickness (Max)="0.020\" (0.51mm)"
C22 C24: library part C1005NP01H080D050BA, "CAP CER 8PF 50V NP0 0402", Capacitance="8 pF", Device Package="0402 (1005 Metric)", Manufacturer="TDK Corporation", Operating Temperature="-55°C ~ 150°C", Supplier Part Number 1=445-13781-1-ND, Temperature Coefficient="C0G, NP0", Tolerance=±0.5pF, Voltage - Rated=50V, Applications="General Purpose", ComponentLink1Description=Datasheet, ComponentLink1URL=https://product.tdk.com/info/en/catalog/datasheets/mlcc_commercial_hightemp_en.pdf?ref_disty=digikey, ComponentLink2Description="DigiKey Link", ComponentLink2URL=https://www.digikey.com/en/products/detail/tdk-corporation/C1005NP01H080D050BA/3951017, Features="High Temperature", lastupdated="2/9/2024 8:04:37 PM", Lifecycle Status=Active, Minimum Order=1, Mounting Type="Surface Mount, MLCC", Package / Case="0402 (1005 Metric)", Packaging=TapeAndReel, Part Number=C1005NP01H080D050BA, Part Status=Active, partid=2033, Price=0.01, Series=C, Size / Dimension="0.039\" L x 0.020\" W (1.00mm x 0.50mm)", Supplier 1=DigiKey, Thickness (Max)="0.022\" (0.55mm)"
D1: library part CL-505S-X-SD-T, "LED TRI TOP FIRING 1.0 X 1.0", Current - Test="5mA Red, 5mA Green, 5mA Blue", Device Package="0404 (1010 Metric)", Lens Color=0.26mm, Manufacturer=Citizen, Millicandela Rating="40mcd Red, 220mcd Green, 65mcd Blue", Supplier Part Number 1=1642-1510-1-ND, Voltage - Forward (Vf) (Typ)="1.85V Red, 2.7V Green, 2.75V Blue", Color="Red, Green, Blue (RGB)", ComponentLink1Description=Datasheet, ComponentLink1URL=http://ce.citizen.co.jp/up_img/product/sQNrj4RlM7o2/CL-505S_e.pdf, ComponentLink2Description="DigiKey Link", ComponentLink2URL=http://digikey.com/product-detail/en/citizen/CL-505S-X-SD-T/1642-1510-1-ND/6005950, Configuration="Common Anode", Height (Max)=0.26mm, lastupdated="3/19/2020 10:25:23 PM", Lens Size=1.00mm, Lens Style="Square with Flat Top", Lifecycle Status=Active, Minimum Order=1, Mounting Type="Surface Mount", Package / Case="0404 (1010 Metric)", Packaging=TapeAndReel, Part Number=CL-505S-X-SD-T, Part Status=Active, partid=955, Price=0.23, Series=CL-505S, Size / Dimension="1.00mm L x 1.00mm W", Supplier 1=DigiKey, Wavelength - Dominant="615nm Red, 530nm Green, 470nm Blue"
J1: library part CMP-002-00080-3, "USB-C (USB TYPE-C) USB 2.0 Receptacle Connector 24 (16+8 Dummy) Position Surface Mount, Right Angle; Through Hole", Case/Package=None, Component Type=Standard, Connector Type=USB-C, Design Item ID=USB4105-GF-A, Gender=Female, Mounting Technology=SMT, MP=USB4105-GF-A, Pins=16, Source=USB4105-GF-A.SchLib
J2: library part CMP-015-000000-3, "1mm JST Connector, surface mounted, horizontal orientation.", Package=None, Gender=Female, Manufacturer Part #=T1M-02-T-SH-L-K, Mounting Technology="Surface Mounted", Pins=2, RoHS Compliant="RoHS3 Compliant"
J3: library part CMP-031-000000-3, "CABLE ADAPTER 6 POS", Package=None, Availability=https://www.tag-connect.com/product/tc2030-idc-nl, Component Type=Standard, Design Item ID=TC2030-IDC-NL, MP=TC2030-IDC-NL, Pin Count=6, Price=None, Source=TC2030-IDC-NL.SchLib
L1: library part FCI1005F-2R2M, "IND  2.2UH  1.7OHM  10MA", Current Rating (Amps)="10 mA", DC Resistance (DCR)="1.7Ohm Max", Device Package="0402 (1005 Metric)", Frequency - Self Resonant=28MHz, Inductance="2.2 µH", Inductance Frequency - Test="10 MHz", Manufacturer="TAI-TECH Advanced Electronics Co., Ltd.", Operating Temperature="-55°C ~ 105°C", Q @ Freq="20 @ 10MHz", Supplier Device Package=0402, Supplier Part Number 1=4816-FCI1005F-2R2MCT-ND, Tolerance=±20%, ComponentLink2Description="DigiKey Link", ComponentLink2URL=https://www.digikey.com/en/products/detail/tai-tech-advanced-electronics-co-ltd/FCI1005F-2R2M/21672129, Height - Seated (Max)="0.024\" (0.60mm)", lastupdated="6/3/2024 8:12:05 PM", Lifecycle Status=Active, Minimum Order=1, Mounting Type="Surface Mount", Package / Case="0402 (1005 Metric)", Packaging=TapeAndReel, Part Number=FCI1005F-2R2M, partid=7361, Price=0.01, Series=FCI1005F, Shielding=Unshielded, Size / Dimension="0.039\" L x 0.020\" W (1.00mm x 0.50mm)", Supplier 1=DigiKey
L2 L3: library part LQW15AN8N3G80D, "FIXED IND 8.3NH 1.5A 0.069OHM SM", Current Rating (Amps)="1.5 A", DC Resistance (DCR)="69mOhm Max", Device Package="0402 (1005 Metric)", Frequency - Self Resonant=6.5GHz, Inductance="8.3 nH", Inductance Frequency - Test="100 MHz", Manufacturer="Murata Electronics", Operating Temperature="-55°C ~ 125°C", Q @ Freq="32 @ 250MHz", Supplier Part Number 1=490-7681-1-ND, Tolerance=±2%, ComponentLink1Description=Datasheet, ComponentLink1URL=https://search.murata.co.jp/Ceramy/image/img/P02/JELF243A-0100.pdf, ComponentLink2Description="DigiKey Link", ComponentLink2URL=https://www.digikey.com/en/products/detail/murata-electronics/LQW15AN8N3G80D/4292394, Height - Seated (Max)="0.024\" (0.60mm)", lastupdated="6/3/2024 8:12:57 PM", Lifecycle Status=Active, Material - Core=Non-Magnetic, Minimum Order=1, Mounting Type="Surface Mount", Package / Case="0402 (1005 Metric)", Packaging=TapeAndReel, Part Number=LQW15AN8N3G80D, Part Status=Active, partid=4902, Price=0.07, Series=LQW15, Shielding=Unshielded, Size / Dimension="0.039\" L x 0.024\" W (1.00mm x 0.60mm)", Supplier 1=DigiKey, Type="Drum Core, Wirewound"
L4: library part LQW15AN9N7J80D, "FIXED IND 9.7NH 1.4A 81 MOHM SMD", Current Rating (Amps)="1.4 A", DC Resistance (DCR)="81mOhm Max", Device Package="0402 (1005 Metric)", Frequency - Self Resonant=6GHz, Inductance="9.7 nH", Inductance Frequency - Test="100 MHz", Manufacturer="Murata Electronics", Operating Temperature="-55°C ~ 125°C", Q @ Freq="33 @ 250MHz", Supplier Part Number 1=490-7688-1-ND, Tolerance=±5%, ComponentLink1Description=Datasheet, ComponentLink1URL=https://search.murata.co.jp/Ceramy/image/img/P02/JELF243A-0100.pdf, ComponentLink2Description="DigiKey Link", ComponentLink2URL=https://www.digikey.com/en/products/detail/murata-electronics/LQW15AN9N7J80D/4292401, Height - Seated (Max)="0.024\" (0.60mm)", lastupdated="6/3/2024 8:13:02 PM", Lifecycle Status=Active, Material - Core=Non-Magnetic, Minimum Order=1, Mounting Type="Surface Mount", Package / Case="0402 (1005 Metric)", Packaging=TapeAndReel, Part Number=LQW15AN9N7J80D, Part Status=Active, partid=4964, Price=0.06, Series=LQW15, Shielding=Unshielded, Size / Dimension="0.039\" L x 0.024\" W (1.00mm x 0.60mm)", Supplier 1=DigiKey, Type=Wirewound
R1: library part TNPW0402470RBYEP, "RES 470 OHM 0.1% 1/16W 0402", Device Package="0402 (1005 Metric)", Manufacturer="Vishay Dale", Operating Temperature="-55°C ~ 155°C", Power (Watts)="0.1W, 1/10W", Ratings=AEC-Q200, Resistance="470 Ohms", Supplier Device Package=0402, Supplier Part Number 1=541-9810-1-ND, Temperature Coefficient=±10ppm/°C, Tolerance=±0.1%, ComponentLink1Description=Datasheet, ComponentLink1URL=http://www.vishay.com/docs/28758/tnpw_e3.pdf, ComponentLink2Description="DigiKey Link", ComponentLink2URL=http://digikey.com/product-detail/en/vishay-dale/TNPW0402470RBYEP/541-9810-1-ND/9562435, Composition="Thin Film", Features="Anti-Sulfur, Automotive AEC-Q200, Moisture Resistant", Height - Seated (Max)="0.016\" (0.40mm)", lastupdated="2/9/2024 8:30:21 PM", Lifecycle Status=Active, Minimum Order=1, Number of Terminations=2, Package / Case="0402 (1005 Metric)", Packaging=TapeAndReel, Part Number=TNPW0402470RBYEP, Part Status=Active, partid=3068, Price=0.27, Series="TNPW e3", Size / Dimension="0.039\" L x 0.020\" W (1.00mm x 0.50mm)", Supplier 1=DigiKey
R2 R3: library part TNPW0402470RBYEP, "RES 470 OHM 0.1% 1/16W 0402", Device Package="0402 (1005 Metric)", Manufacturer="Vishay Dale", Operating Temperature="-55°C ~ 155°C", Power (Watts)="0.1W, 1/10W", Ratings=AEC-Q200, Supplier Device Package=0402, Supplier Part Number 1=541-9810-1-ND, Temperature Coefficient=±10ppm/°C, Tolerance=±0.1%, ComponentLink1Description=Datasheet, ComponentLink1URL=http://www.vishay.com/docs/28758/tnpw_e3.pdf, ComponentLink2Description="DigiKey Link", ComponentLink2URL=http://digikey.com/product-detail/en/vishay-dale/TNPW0402470RBYEP/541-9810-1-ND/9562435, Composition="Thin Film", Features="Anti-Sulfur, Automotive AEC-Q200, Moisture Resistant", Height - Seated (Max)="0.016\" (0.40mm)", lastupdated="2/9/2024 8:30:21 PM", Lifecycle Status=Active, Minimum Order=1, Number of Terminations=2, Package / Case="0402 (1005 Metric)", Packaging=TapeAndReel, Part Number=TNPW0402470RBYEP, Part Status=Active, partid=3068, Price=0.27, Resistance="470 Ohms", Series="TNPW e3", Size / Dimension="0.039\" L x 0.020\" W (1.00mm x 0.50mm)", Supplier 1=DigiKey
R5: library part RC0402JR-07300KL, "RES 300K OHM 5% 1/16W 0402", Device Package="0402 (1005 Metric)", Manufacturer=Yageo, Operating Temperature="-55°C ~ 155°C", Power (Watts)="0.063W, 1/16W", Resistance="300 kOhms", Supplier Device Package=0402, Supplier Part Number 1=311-300KJRCT-ND, Temperature Coefficient=±100ppm/°C, Tolerance=±5%, ComponentLink1Description=Datasheet, ComponentLink1URL=https://www.yageo.com/upload/media/product/productsearch/datasheet/rchip/PYu-RC_Group_51_RoHS_L_10.pdf, ComponentLink2Description="DigiKey Link", ComponentLink2URL=https://www.digikey.com/en/products/detail/yageo/RC0402JR-07300KL/726462, Composition="Thick Film", Features="Moisture Resistant", Height - Seated (Max)="0.016\" (0.40mm)", lastupdated="2/9/2024 8:30:13 PM", Lifecycle Status=Active, Minimum Order=1, Number of Terminations=2, Package / Case="0402 (1005 Metric)", Packaging=CutTape, Part Number=RC0402JR-07300KL, Part Status=Active, partid=4858, Price=0.01, Series=RC_L, Size / Dimension="0.039\" L x 0.020\" W (1.00mm x 0.50mm)", Supplier 1=DigiKey
R6 R7 R8: library part RP73PF1E10KBTD, "RES 10K OHM 0.1% 1/10W 0402", Device Package="0402 (1005 Metric)", Manufacturer="TE Connectivity Passive Product", Operating Temperature="-55°C ~ 155°C", Power (Watts)="0.1W, 1/10W", Resistance="10 kOhms", Supplier Device Package=0402, Supplier Part Number 1=A127415CT-ND, Temperature Coefficient=±25ppm/°C, Tolerance=±0.1%, ComponentLink1Description=Datasheet, ComponentLink1URL=https://www.te.com/commerce/DocumentDelivery/DDEController?Action=srchrtrv&DocNm=1773272&DocType=DS&DocLang=English, ComponentLink2Description="DigiKey Link", ComponentLink2URL=https://www.digikey.com/en/products/detail/te-connectivity-passive-product/RP73PF1E10KBTD/8260957, Composition="Thin Film", Height - Seated (Max)="0.014\" (0.35mm)", lastupdated="2/9/2024 8:30:24 PM", Lifecycle Status=Active, Minimum Order=1, Number of Terminations=2, Package / Case="0402 (1005 Metric)", Packaging=TapeAndReel, Part Number=RP73PF1E10KBTD, Part Status=Active, partid=2434, Price=0.08, Series="RP73, Holsworthy", Size / Dimension="0.039\" L x 0.020\" W (1.00mm x 0.50mm)", Supplier 1=DigiKey
SW1 SW2 SW3 SW4 SW5 SW6: library part CMP-011-00018-1, "Keypad Switch, 1 Switches, SPST, Momentary, 0.01A, 12VDC, 0.78N, Solder Terminal, Through Hole-straight", Contact Current(DC)-Max=10mA, Contact DC Max Rating R Load=.01A@12VDC, Contact Voltage(DC)-Max=12V, Manufacturer Series=MX, Max Operating Temperature=70°C, Min Operating Temperature=-10°C, Operating Force-Max=0.78N, Body Breadth=15.6inch, Body Height=11.6mm, Body Length or Diameter=15.6mm, Circuit Configuration=1X1, Contact Bounce Time-Max=5ms, Electrical Life=50000000Cycles, Mounting Technology="Through Hole", Number of Switches=1, Reach SVHC Compliant=Yes, RoHS Compliant=Yes, Switch Action=MOMENTARY, Switch Function=SPST, Switch Type=Keypad, Termination=Solder
SW7: library part CMP-011-00017-1, "Microminiature SMT Switch, Side Actuated", Manufacturer=C&K, Part number IPS=00000001260, Part number Norautron=N.A., Artikkelnr Noca=50019089, Author=rsk, Component Class=Switches, Component Type=Standard, ComponentLink1Description=Datasheet, ComponentLink1URL=N.A., ComponentLink2Description="Supplier link", ComponentLink2URL=N.A., Design Item ID="PTS840 GK SMTR LFS", Footprint Doc="PTS840 Gx", HelpURL=http://www.ck-components.com/80185/pts840_11june13.pdf/, LatestRevisionDate=2017-11-09, Manufacturer Part Number="PTS840 GK SMTR LFS", Note="Tactile Switch, SPST, SMD, 220gf", Pad Count=4, Part Number="PTS840 GK SMTR LFS", partid=101500010, Pins=2, Published=2014-08-12, Source=pca10059.SCHLIB
U1: library part CMP-00029-00006-5, "Battery Power Management IC Lithium Ion/Polymer 32-QFN (5x5)", Case/Package="32-QFN (5x5)", JLCPCB Part #=C7466043, Max Operating Temperature=85°C, Min Operating Temperature=40°C, Manufacturer Part #=NPM1300-QEAA-R, Mounting Technology="Surface Mount", Pins=33, RoHS Compliant="ROHS3 Compliant"
U2: library part CMP-020-00027-11, "IC RF TxRx + MCU 802.15.4, Bluetooth Bluetooth v5.0, Thread, Zigbee® 2.4GHz 73-VFQFN Dual Rows, Exposed Pad", Case/Package="73-VFQFN Dual Rows, Exposed Pad", Clock Frequency=64MHz, Frequency=2.4GHz, JLCPCB Part #=C190794, Max Operating Temperature=125°C, Max Supply Voltage=5.5V, Min Operating Temperature=-40°C, Min Supply Voltage=1.7V, Nominal Supply Voltage=3.3V, I/Os=48, Interface="ADC, I2S, PDM, PWM, SPI, TWI, UART, USB", Manufacturer Part #=NRF52840-QIAA-R, Mounting Technology="Surface Mount", Pins=73, RAM Size="256kB RAM", RoHS Compliant="ROHS3 Compliant"
Y1: library part ABS06-32.768KHZ-1-T, "CRYSTAL 32.7680KHZ 12.5PF SMD", ESR (Equivalent Series Resistance)="90 kOhms", Frequency Tolerance=±10ppm, Load Capacitance=12.5pF, Manufacturer="Abracon LLC", Operating Mode=Fundamental, Operating Temperature="-40°C ~ 85°C", Package / Case="2-SMD, No Lead", Supplier Part Number 1=535-10248-1-ND, ComponentLink1Description=Datasheet, ComponentLink1URL=https://abracon.com/Resonators/ABS06.pdf, ComponentLink2Description="DigiKey Link", ComponentLink2URL=https://www.digikey.com/en/products/detail/abracon-llc/ABS06-32-768KHZ-1-T/2217994, Frequency="32.768 kHz", Height - Seated (Max)="0.024\" (0.60mm)", lastupdated="6/3/2024 8:02:03 PM", Lifecycle Status=Active, Minimum Order=1, Mounting Type="Surface Mount", Packaging=TapeAndReel, Part Number=ABS06-32.768KHZ-1-T, Part Status=Active, partid=370, Price=0.33, Series=ABS06, Size / Dimension="0.079\" L x 0.047\" W (2.00mm x 1.20mm)", Supplier 1=DigiKey, Type="kHz Crystal (Tuning Fork)"
Y2: library part CMP-003-00031-3, "32 MHz ±10ppm Crystal 8pF 60 Ohms 4-SMD, No Lead", Case/Package="4-SMD, No Lead", JLCPCB Part #=C914155, Load Capacitance=8pF, Manufacturer Part #=XRCGB32M000F1H01R0, Max Operating Temperature=85°C, Min Operating Temperature=-30°C, ESR=60, Frequency=32MHz, Mounting Technology="Surface Mount", Pins=4, RoHS Compliant="ROHS3 Compliant"

## Free pads (board coordinates)
  round 0 hole 3 unplated paste-2539.97 mask-2539.97: MT(-25,-30) MT(-25,20) MT(25,-30) MT(25,20)

## Via types
v1: diameter 0.5, hole 0.2, L1 (Sig) to L4 (Sig), tented both sides, 102 vias
v2: diameter 0.5, hole 0.2, L1 (Sig) to L4 (Sig), tented bottom, 16 vias
v3: diameter 0.61, hole 0.305, L1 (Sig) to L4 (Sig), tented bottom, 9 vias

## Nets (pads, with @x,y where several pads share a name; then routed paths per layer and width w, separated by ;. In a path a pad name is that pad's centre, name@x,y a point inside that pad or via, vN(x,y) a via of type N, cw(c..) or ccw(c..) an arc to the next point about the centre after c; other vN are vias at no path point)
3V3: C6.2 C7.2 C10.2 C11.2 C12.2 C13.2 C14.2 J3.1 L1.2 R6.1 R7.2 R8.1 U1.12 U1.32 U2.A22 U2.AD14 U2.AD23 U2.B1 U2.W1 U2.Y2 | length 102.6
  L1 (Sig) w0.152: C11.2@9.555,19.78 C11.2 ; U2.A22 C12.2
  L1 (Sig) w0.178: C10.2@9.095,13.25 U2.W1 10.46,13.25 10.71,13.5 v1(10.725,13.5) 10.75,13.475 U2.Y2 ; C11.2@9.555,19.78 10.25,19.085 U2.B1 ; U2.AD14 13.925,11.575 v1(13.925,11.281) 13.925,10.77 C13.2@14.03,10.665 ; U2.AD23 16.25,11.095 16.66,10.685 C14.2
  L1 (Sig) w0.3: -13.487,17.12 -16.637,17.12 -17.077,16.68 L1.2 -17.077,8.924 -16.612,8.458 v1(-12.46,8.458) -12.46,9.848 -12.31,9.998 -12.29,9.998 -11.875,10.413 U1.12 ; U1.32 -13.375,17.12 -13.375,18.851 -13.001,19.225 -9.452,19.225 -9.1,19.577 R8.1 ; v1(2.9,13.325) R7.2 ; v1(6.625,11.45) R6.1 ; C11.2 v1(9.555,20.5) ; v1(15.05,19.36) C12.2 ; C14.2 16.66,10.645 16.51,10.495 16.49,10.495 16.3,10.305 v1(16.3,9.1) 16.32,9.12 18.895,9.12 19.615,9.84 v1(19.615,11.4)
  L4 (Sig) w0.3: v1(-12.46,8.458) -12.453,8.465 6.625,8.465 ; v1(2.9,13.325) 6.375,13.325 6.625,13.075 v1(6.625,11.45) 6.625,8.465 ; v1(9.555,20.5) 9.555,19.731 9.926,19.36 10.725,19.36 ; v1(15.05,19.36) 10.725,19.36 ; v1(16.3,9.1) 16.3,10.839 15.857,11.281 v1(13.925,11.281) 10.798,11.281 10.725,11.354 ; v1(19.615,11.4) 19.635,11.4 20.23,11.995 J3.1 ; 6.625,8.465 10.065,8.465 10.725,9.125 10.725,11.354 ; 10.725,11.354 10.725,19.36
CC1: J1.A5 U1.23 | length 16
  L1 (Sig) w0.152: U1.23 -8.475,14.85 v1(-7.65,15.675)
  L1 (Sig) w0.17: J1.A5 v1(1.25,17.035)
  L4 (Sig) w0.152: v1(-7.65,15.675) -7.65,17.8 -7.375,18.075 -2.726,18.075 -2.5,17.849 -2.5,16.591 -2.259,16.35 1.075,16.35 1.25,16.525 v1(1.25,17.035)
CC2: J1.B5 U1.24 | length 12.9
  L1 (Sig) w0.152: U1.24 -8.539,15.35 -8.35,15.539 v1(-8.35,16.575) ; J1.B5 v1(-1.75,17.3)
  L4 (Sig) w0.152: v1(-8.35,16.575) -8.35,18.325 -7.875,18.8 -2.275,18.8 -1.75,18.275 v1(-1.75,17.3)
CHG: R2.2 U1.26 | length 17.9
  L1 (Sig) w0.152: R2.2 v1(-21.876,16.625) ; U1.26 -10.362,16.063 -10.362,17.738 v1(-10.35,17.75)
  L4 (Sig) w0.152: v1(-21.876,16.625) -21.876,18.099 -21.375,18.6 -10.67,18.6 -10.35,18.28 v1(-10.35,17.75)
CHG_LED: D1.2 R2.1 | length 1.7
  L1 (Sig) w0.152: D1.2 R2.1
DEC1: C16.2 U2.C1 | length 2.5
  L1 (Sig) w0.152: U2.C1 10.424,17.25 10.637,17.463 10.637,18.997 10.756,19.116 10.756,19.136 10.98,19.36 C16.2
DEC2: C17.2 U2.A18 | length 1.3
  L1 (Sig) w0.152: C17.2 14.27,19.36 14.494,19.136 14.494,19.116 14.75,18.86 U2.A18@14.75,18.263
DEC3: C18.2 U2.D23 | length 2.5
  L1 (Sig) w0.152: U2.D23 16.425,17 17.15,17.725 18.195,17.725 C18.2
DEC4_6: C19.2 C20.2 U2.B5 U2.E24 | length 14
  L1 (Sig) w0.152: U2.B5 11.5,18.75 11.886,19.136 12.101,19.136 C19.2 ; U2.E24 17.25,17.25 v1(17.55,17.25) ; v1(20.752,18.28) C20.2
  L4 (Sig) w0.152: v1(11.5,18.263) 17.5,18.263 20.734,18.263 v1(20.752,18.28) ; v1(17.55,17.25) 17.55,18.213
DONE: R3.2 U1.27 | length 16.2
  L1 (Sig) w0.152: v1(-21.275,15.775) -21.275,15.05 -20.575,14.35 R3.2 ; U1.27 v1(-10.875,17)
  L4 (Sig) w0.152: v1(-21.275,15.775) -21.275,17.725 -20.9,18.1 -11.1,18.1 -10.875,17.875 v1(-10.875,17)
DONE_LED: D1.3 R3.1 | length 2.6
  L1 (Sig) w0.152: D1.3 -21.275,12.35 -20.575,13.05 R3.1
ERR: R1.2 U1.25 | length 20.2
  L1 (Sig) w0.152: R1.2 -23.175,14.35 -22.475,15.05 v1(-22.475,15.775) ; U1.25 v1(-9.875,18.625)
  L4 (Sig) w0.152: v1(-22.475,15.775) -22.477,15.777 -22.477,18.548 -21.925,19.1 -10.35,19.1 v1(-9.875,18.625)
ERR_LED: D1.1 R1.1 | length 2.5
  L1 (Sig) w0.152: R1.1@-23.175,13.05 -22.477,12.352 D1.1
GND: C1.1 C2.1 C3.2 C4.2 C5.1 C6.1 C7.1 C8.2 C9.1 C10.1 C11.1 C12.1 C13.1 C14.1 C15.2 C16.1 C17.1 C18.1 C19.1 C20.1 C22.1 C23.2 C24.1 J1.A1B12 J1.B1A12 J2.2 J3.5 L3.1 L4.2 R5.1 SW1.2 SW2.2 SW3.2 SW4.2 SW5.2 SW6.2 SW7.1 U1.2 U1.6 U1.17 U1.18 U1.28 U1.29 U1.30 U1.31 U1.33 U2.74 U2.B7 U2.F23 Y2.2 Y2.4 | length 49.6
  L1 (Sig) w0.152: U1.6 -12.375,12.85 v3(-11.625,13.6) -11.375,13.85 U1.28 ; U1.2 U1.33@-12.875,14.85 ; U1.31 U1.33@-12.875,14.85 ; v3(-12.825,14.8) U1.33@-12.875,14.85 ; U1.30 -12.375,14.35 -11.875,13.85 U1.29 ; U1.17 -9.875,11.85 v3(-10.425,12.4) -10.375,12.35 U1.18 ; U2.B7 12,16.5 U2.74 v2(14.05,15.55) 15,16.5 U2.F23 ; C17.1 C17.1@14.27,20.26 ; Y2.4@18.225,20.025 Y2.4 ; C22.1 v1(19.875,18.825) ; Y2.2 Y2.2@19.375,21.575
  L1 (Sig) w0.3: C6.1 v1(-15.5,11.608) ; C3.2 v1(-15.75,15.775) ; SW7.1@-14.8,20.375 v1(-13,20.375) SW7.1@-11.2,20.375 ; v1(-14,9.828) C7.1 ; v1(-9.875,7.4) R5.1 ; C4.2 v1(-5.4,12.975) ; C1.1 v1(-6.06,15.875) ; C2.1 v1(-5.4,16.55) ; C5.1 v1(-5.375,11.745) ; J1.B1A12 v1(-3.2,17.035) ; J1.A1B12 v1(3.2,17.035) ; v1(7.55,12.1) C23.2 ; v1(7.55,13.408) C10.1 ; v1(8.025,19.8) C11.1 ; v1@8.221,18.843 v1(8.2,18.821) 8.644,18.821 9.075,18.39 C8.2 ; v1(8.375,15.285) C15.2 ; v1(9.75,9.76) C9.1 ; C16.1 v1(11,20.9) ; C19.1 v1(12.325,20.9) ; v1(13.925,9.1) C13.1 ; C17.1@14.27,20.26 v1(14.27,20.9) ; C12.1 v1(15.75,20.9) ; C24.1 v1(17,22.1) ; v1(17.525,19.325) Y2.4@18.225,20.025 ; C14.1 17.545,10.66 17.545,9.652 v1(17.55,9.647) ; v1(17.925,14.65) L4.2 ; C18.1 v1(19.875,17.575) ; Y2.2@19.375,21.575 v1(20.1,22.3) ; C20.1 v1(20.752,20.43) ; v1@21.1,16.875 v1(21.125,16.85) ; v1(21.125,14.65) L3.1
  L4 (Sig) w0.3: J2.2 v1(-10.1,5.3) ; v1(19.615,8.775) 19.615,8.798 20.25,9.433 J3.5
  other v1: 21.925,10.65 22.725,10.65 23.525,10.65 24.325,10.65 25.125,10.65 25.925,10.65 26.725,10.65 27.525,10.65 21.925,11.45 21.925,12.25 21.925,13.05 21.925,13.85 18.725,14.65 19.525,14.65 20.325,14.65 21.925,14.65 18.725,16.85 19.525,16.85 20.325,16.85 21.925,16.85 21.925,17.65 21.925,18.45 21.925,19.25 21.925,20.05 21.925,20.85 21.925,21.65 21.925,22.45
  other v2: 11.85,13.35 12.95,13.35 14.05,13.35 15.15,13.35 11.85,14.45 12.95,14.45 14.05,14.45 15.15,14.45 11.85,15.55 12.95,15.55 15.15,15.55 11.85,16.65 12.95,16.65 14.05,16.65 15.15,16.65
  other v3: -12.825,12.4 -11.625,12.4 -12.825,13.6 -10.425,13.6 -11.625,14.8 -10.425,14.8
MX_1: SW1.1 U2.AD10 | length 65.1
  L1 (Sig) w0.152: SW1.1 -21.5,1.18 -21.5,-8 -21,-8.5 11.5,-8.5 12.075,-7.925 12.075,1.525 12.75,2.2 U2.AD10
MX_2: SW2.1 U2.AD8 | length 43.6
  L1 (Sig) w0.152: SW2.1 -2.5,1.23 -2.5,-7 -2,-7.5 11,-7.5 11.425,-7.075 11.425,1.9 12.25,2.725 U2.AD8
MX_3: SW3.1 U2.AD22 | length 9.4
  L1 (Sig) w0.152: SW3.1 15.24,3.04 15.75,3.55 15.75,10.175 U2.AD22
MX_4: SW4.1 U2.AD12 | length 62.5
  L1 (Sig) w0.152: SW4.1 -21.5,-15.15 -21.5,-10 -21,-9.5 11.9,-9.5 12.725,-8.675 12.725,1.125 13.25,1.65 U2.AD12
MX_5: SW5.1 U2.AD18 | length 44.9
  L1 (Sig) w0.152: v1(14.75,8.9) U2.AD18
  L4 (Sig) w0.152: SW5.1 -3.51,-16.51 -3.51,-16.219 -2.5,-15.209 -2.5,-11 -2,-10.5 6.5,-10.5 7.453,-9.547 7.453,7.174 7.95,7.671 14.396,7.671 14.75,8.025 v1(14.75,8.9)
MX_6: SW6.1 U2.AD20 | length 41.8
  L1 (Sig) w0.152: v1(15.25,10) U2.AD20
  L4 (Sig) w0.152: SW6.1 8.51,-16.51 8,-16 8,6.5 8.5,7 14.586,7 15.25,7.664 v1(15.25,10)
NetA1_1: A1.1 L2.1 L3.2 | length 3.8
  L1 (Sig) w0.17: L2.1@19.965,16.115 L3.2 A1.1@23.635,16.115 ; A1.1 A1.1@23.635,16.115 ; A1.1@23.7,16.115 A1.1@23.635,16.115
NetC23_1: C23.1 U2.AC5 | length 2.5
  L1 (Sig) w0.178: C23.1@9.095,11.99 9.205,12.1 11.35,12.1 U2.AC5
NetL2_2: L2.2 L4.1 U2.H23 | length 2.9
  L1 (Sig) w0.17: U2.H23 16.365,16.115 19.085,16.115 L2.2@19.085,16.075
RESET: J3.3 R8.2 SW7.2 U2.AC13 U2.AC15 U2.AC17 U2.AC19 U2.AC21 | length 61.3
  L1 (Sig) w0.152: SW7.2@-14.8,21.825 -11.2,21.825 R8.2@-9.05,21.825 ; R8.2@-9.025,21.8 -9,21.825 v1(-8.3,21.825) ; v1(-6.391,10.7) -6.391,7.891 -5.9,7.4 4.425,7.4 4.8,7.025 4.8,5.924 5.174,5.55 v1(10.75,5.55) ; U2.AC13 U2.AC19 U2.AC21 v1(16.2,12.25)
  L4 (Sig) w0.152: v1(-8.3,21.825) -8.3,19.589 -9.125,18.764 -9.125,14.459 -8.738,14.072 -6.747,14.072 -6.391,13.716 v1(-6.391,10.7) ; v1(10.75,5.55) 16.525,5.55 16.975,6 16.975,10.1 ; v1(16.2,12.25) 16.7,12.25 16.975,11.975 16.975,10.1 ; J3.3 19.625,10.1 16.975,10.1
SCL: R6.2 U1.14 U2.R1 | length 26.7
  L1 (Sig) w0.152: v1(-10.875,9.025) U1.14 ; v1(5.55,12.575) 5.564,12.561 5.936,12.561 6.401,13.026 6.625,13.25 R6.2 ; R6.2@6.625,13.4 7.475,14.25 U2.R1
  L4 (Sig) w0.152: v1(-10.875,9.025) 2.725,9.025 3.525,9.825 3.525,11.275 3.85,11.6 5.3,11.6 5.55,11.85 v1(5.55,12.575)
SDA: R7.1 U1.13 U2.N1 | length 25.9
  L1 (Sig) w0.152: v1(-11.375,9.975) U1.13 ; v1(4.325,12.575) 4.325,12.95 4.7,13.325 4.85,13.325 6.275,14.75 U2.N1@10.237,14.75
  L4 (Sig) w0.152: v1(-11.375,9.975) 1.975,9.975 2.4,10.4 2.4,12.025 2.95,12.575 v1(4.325,12.575)
SW2: L1.1 U1.5 | length 1.9
  L1 (Sig) w0.3: L1.1@-16.194,12.881 L1.1 -16.197,12.928 -15.775,13.35 -14.507,13.35
SWDCLK: J3.4 U2.AA24 | length 4.1
  L1 (Sig) w0.152: U2.AA24 v1(17.425,12.75)
  L4 (Sig) w0.152: v1(17.425,12.75) 17.425,11.175 17.875,10.725 J3.4@19.115,10.725
SWDIO: J3.2 U2.AC24 | length 2.3
  L1 (Sig) w0.152: U2.AC24 17.762,12.25 18.025,11.987 v1(18.025,11.975)
  L4 (Sig) w0.152: v1(18.025,11.975) 18.035,11.985 18.913,11.985 J3.2@18.923,11.995
USB_D_N: J1.A7 J1.B7 U2.AD4 | length 28.7
  L1 (Sig) w0.17: J1.A7 -0.25,16.9 -0.15,17 0.648,17 0.75,16.898 J1.B7 0.75,14.75 0.2,14.2 0.2,8.927 0.587,8.54 4.725,8.54 4.924,8.54 5.024,8.64 5.024,9.455 5.252,9.683 6.253,9.683 6.482,9.455 6.482,7.273 7.16,7.273 7.16,8.212 7.488,8.54 8.6,8.54 10.988,8.54 11.305,8.857 11.305,11.687 11.25,11.742 U2.AD4
USB_D_P: J1.A6 J1.B6 U2.AD6 | length 29.2
  L1 (Sig) w0.17: J1.B6 -0.75,15.1 ; J1.A6 0.23,16.053 0.23,15.2 0.13,15.1 -0.75,15.1 ; U2.AD6 11.75,11.742 11.695,11.687 11.695,8.695 11.15,8.15 8.6,8.15 7.649,8.15 7.55,8.05 7.55,7.111 7.321,6.883 6.32,6.883 6.092,7.111 6.092,9.293 5.414,9.293 5.414,8.478 5.086,8.15 4.725,8.15 0.425,8.15 -0.19,8.765 -0.19,14.19 -0.75,14.75 -0.75,15.1
VBAT: C5.2 J2.1 U1.19 | length 11.8
  L1 (Sig) w0.3: U1.19 -8.045,12.85 C5.2@-6.94,11.745 ; v1(-9.1,5.3) -8.1,5.3 -7.6,5.8 -7.6,11.065 C5.2@-6.94,11.725
  L4 (Sig) w0.3: J2.1 v1(-9.1,5.3)
VBUS: C2.2 C9.2 U1.22 U2.AD2 | length 28.8
  L1 (Sig) w0.152: C9.2 10.425,11.425 U2.AD2
  L1 (Sig) w0.3: U1.22 -8.2,14.35 -6.94,15.61 C2.2 v1(-6.94,17.2) ; v1(9.75,10.64) C9.2
  L4 (Sig) w0.3: v1(-6.94,17.2) -6.94,14.94 -6.525,14.525 7.9,14.525 8.306,14.119 8.306,11.024 8.689,10.64 v1(9.75,10.64)
VSET: R5.2 U1.16 | length 1.9
  L1 (Sig) w0.152: R5.2 U1.16
VSYS: C3.1 C4.1 D1.4 U1.1 U1.4 U1.20 | length 28.1
  L1 (Sig) w0.3: v1(-21.876,9.3) D1.4@-21.876,10.149 ; C3.1@-15.795,14.325 -15.737,14.268 -14.932,14.268 v1(-14.925,14.275) -14.925,14.269 -14.506,13.85 U1.4 ; v1(-14.925,15.35) U1.1 ; U1.20 -7.625,13.35 v1(-7.6,13.375) -7.562,13.337 -7.282,13.337 -6.94,12.995 C4.1
  L4 (Sig) w0.305: v1(-21.876,9.3) -21.823,9.3 -21.723,9.2 -15.7,9.2 -14.925,9.975 -14.925,11.3 ; v1(-14.925,15.35) v1(-14.925,14.275) -14.925,11.3 ; v1(-7.6,13.375) -7.6,11.55 -7.95,11.2 -14.825,11.2 -14.925,11.3
VUSB: C1.2 J1.A4B9 J1.B4A9 U1.21 | length 17.4
  L1 (Sig) w0.3: U1.21 -7.87,13.85 -7.435,14.285 C1.2
  L1 (Sig) w0.5: C1.2 -2.751,14.285 -2.4,14.636 J1.B4A9 -2.4,17.949 -2.049,18.3 2.1,18.3 2.4,18 J1.A4B9
XC1: C22.2 U2.B24 Y2.1 | length 3.7
  L1 (Sig) w0.152: U2.B24 16.75,17.762 17.813,18.825 C22.2 18.345,18.845 18.569,19.069 18.589,19.069 18.8,19.28 18.8,19.45 19.375,20.025 Y2.1
XC2: C24.2 U2.A23 Y2.3 | length 4.3
  L1 (Sig) w0.152: U2.A23 17,19 C24.2 17.02,20.56 17.244,20.784 17.244,20.804 17.34,20.9 17.646,20.9 17.872,21.126 17.876,21.126 18.225,21.475 Y2.3
XL1: C8.1 U2.D2 Y1.2 | length 3.8
  L1 (Sig) w0.152: Y1.2@7.3,17.625 7.415,17.51 C8.1@9.115,17.51 ; C8.1 C8.1@9.115,17.51 ; U2.D2 10.737,17 10.637,16.9 9.705,16.9 9.339,17.266 9.339,17.286 C8.1@9.115,17.51
XL2: C15.1 U2.F2 Y1.1 | length 3.7
  L1 (Sig) w0.152: Y1.1@7.3,16.175 9.085,16.175 C15.1 9.115,16.165 9.339,16.389 9.339,16.409 9.532,16.602 10.637,16.602 10.739,16.5 U2.F2
pads on no net: A1.2 J1.A8 J1.B8 J1.SH1 J1.SH2 J1.SH3 J1.SH4 J2.S1 J2.S2 J3.6 J3.MH1 J3.MH2 J3.MH3 SW1.MH1 SW1.MH2 SW1.MH3 SW2.MH1 SW2.MH2 SW2.MH3 SW3.MH1 SW3.MH2 SW3.MH3 SW4.MH1 SW4.MH2 SW4.MH3 SW5.MH1 SW5.MH2 SW5.MH3 SW6.MH1 SW6.MH2 SW6.MH3 U1.3 U1.7 U1.8 U1.9 U1.10 U1.11 U1.15 U2.A8 U2.A10 U2.A12 U2.A14 U2.A16 U2.A20 U2.AB2 U2.AC9 U2.AC11 U2.AD16 U2.B3 U2.B9 U2.B11 U2.B13 U2.B15 U2.B17 U2.B19 U2.G1 U2.H2 U2.J1 U2.J24 U2.K2 U2.L1 U2.L24 U2.M2 U2.N24 U2.P2 U2.P23 U2.R24 U2.T2 U2.T23 U2.U1 U2.U24 U2.V23 U2.W24 U2.Y23

## Polygon pours and split planes (outlines as drawn)
GND on L2 (GND) "NONET_L-01_P-001" (solid, pour order 15): -28,23 28,23 28,-33 -28,-33
GND on L3 (GND) "NONET_L-01_P-001" (solid, pour order 16): -28,23 28,23 28,-33 -28,-33

## Other copper
L1 (Sig):
  pour cut-out: 6.5,17.2 6.5,16.5 8.1,16.5 8.1,17.2
  pour cut-out: 17.7,21.2 19.9,21.2 19.9,20.55 17.7,20.55
  pour cut-out: 28,23 22.275,23 22.275,11 28,11
L2 (GND):
  pour cut-out: 28,23 22.275,23 22.275,11 28,11
L3 (GND):
  pour cut-out: 28,23 22.275,23 22.275,11 28,11
L4 (Sig):
  pour cut-out: 28,23 22.275,23 22.275,11 28,11

## Silkscreen, mask and mechanical layers (free items; w line width, h text height)
Board Layer Stack Bottom Overlay:
  lines w0.254: -9.625,6.5 -8.575,6.5 ; -9.1,5.975 -9.1,7.025
  text "REV-B 08/24" at -11.652,-7.508 h1.02
  text "bumblebee" at 23,-8 h3.05
Board Layer Stack Top Solder:
  circle w2.25: c25,20 r1.125
  circle w2.25: c-25,20 r1.125
  circle w2.25: c-25,-30 r1.125
  circle w2.25: c25,-30 r1.125
Board Layer Stack Bottom Solder:
  circle w2.25: c25,20 r1.125
  circle w2.25: c-25,20 r1.125
  circle w2.25: c-25,-30 r1.125
  circle w2.25: c25,-30 r1.125
Mechanical 10:
  lines w0.254: -28,-30.1 ccw(c-25.1,-30.1) -25.1,-33 0,-33 25.1,-33 ccw(c25.1,-30.1) 28,-30.1 28,20.1 ccw(c25.1,20.1) 25.1,23 -25.1,23 ccw(c-25.1,20.1) -28,20.1 -28,-30.1